# EAGLE board PCB_KioskMB_r3.3-02 (EAGLE 8.2.1), part 1 of 3
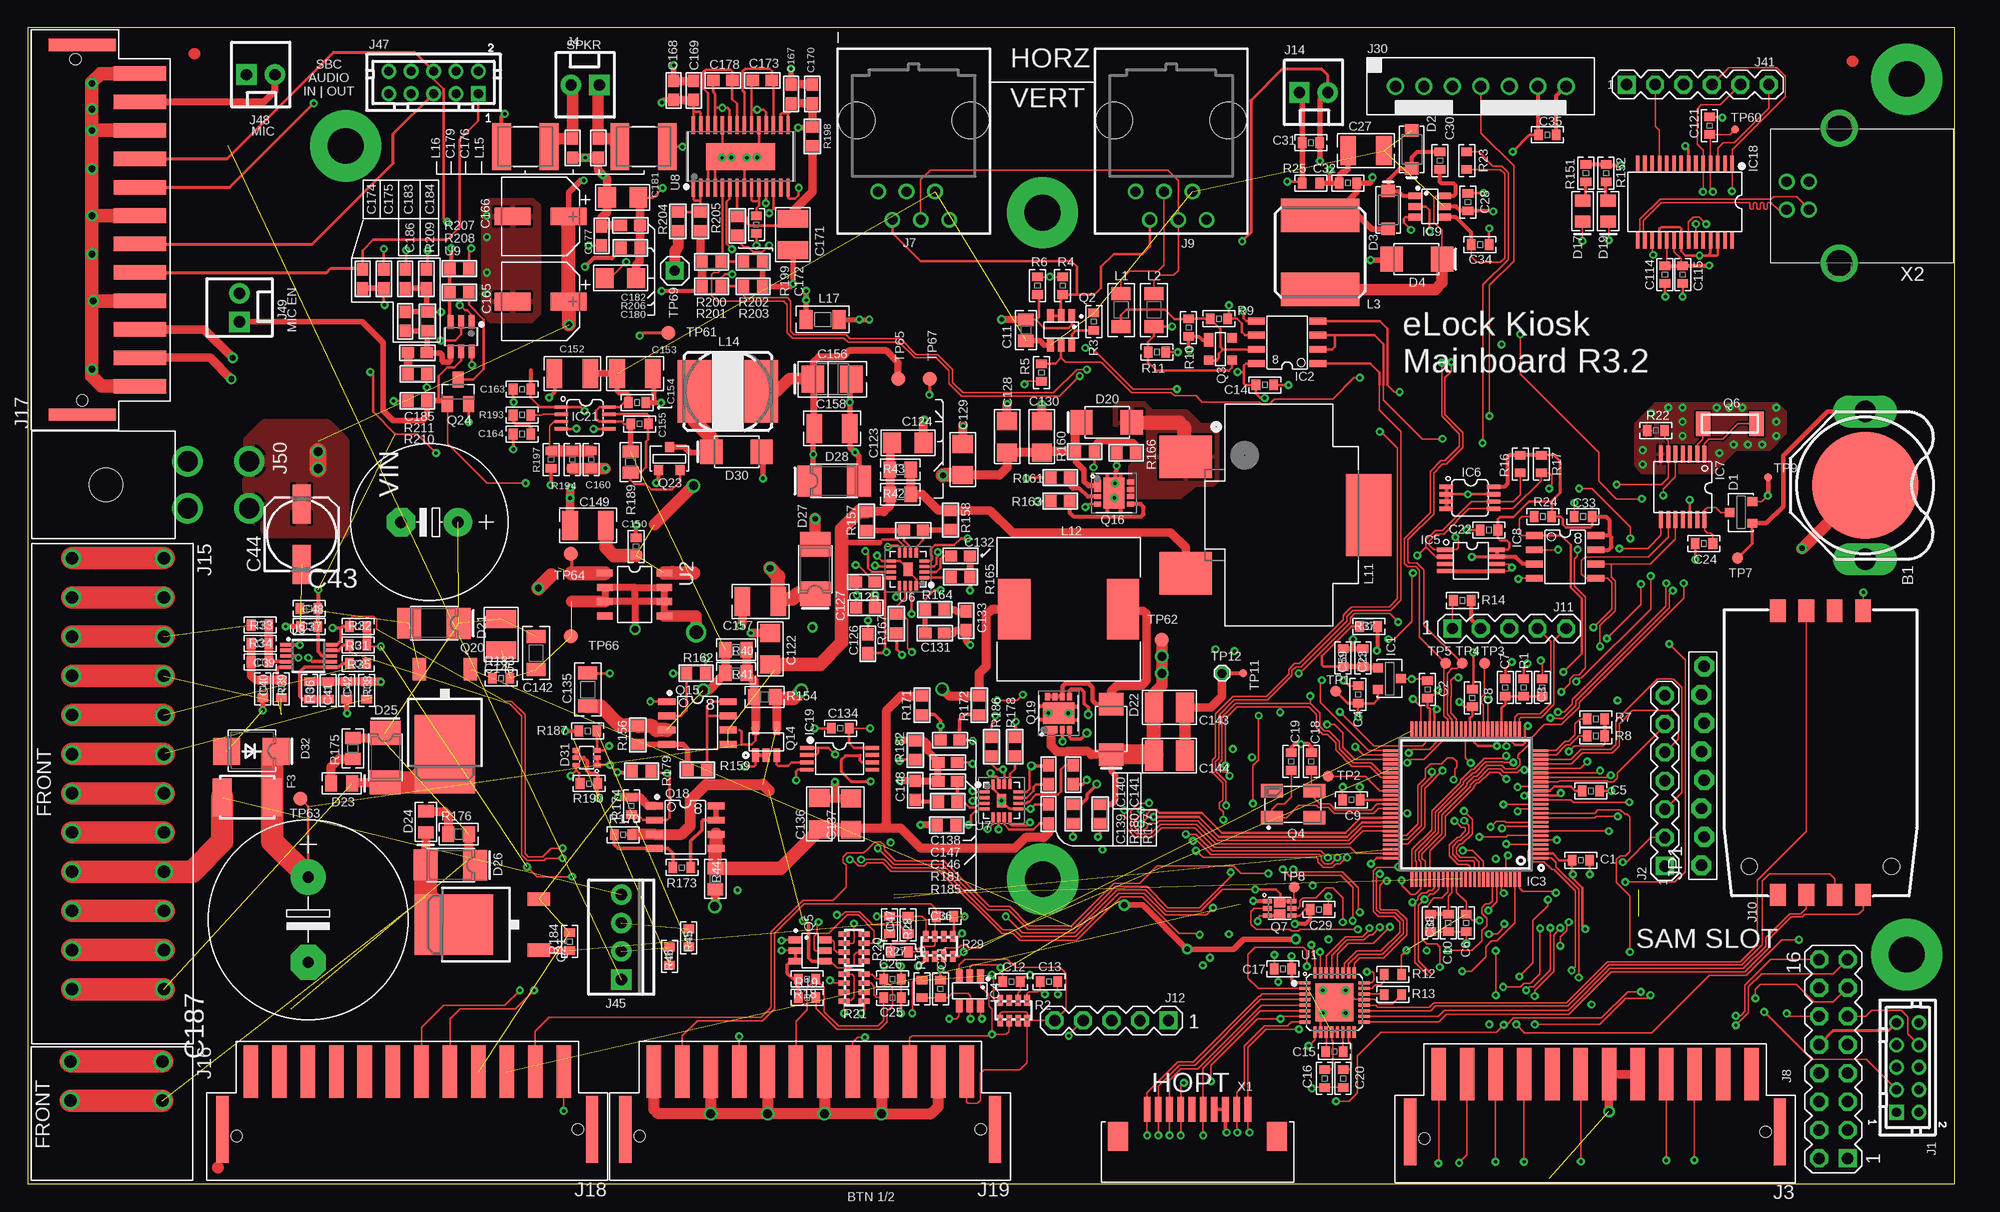
[diagram p0: board, top side]
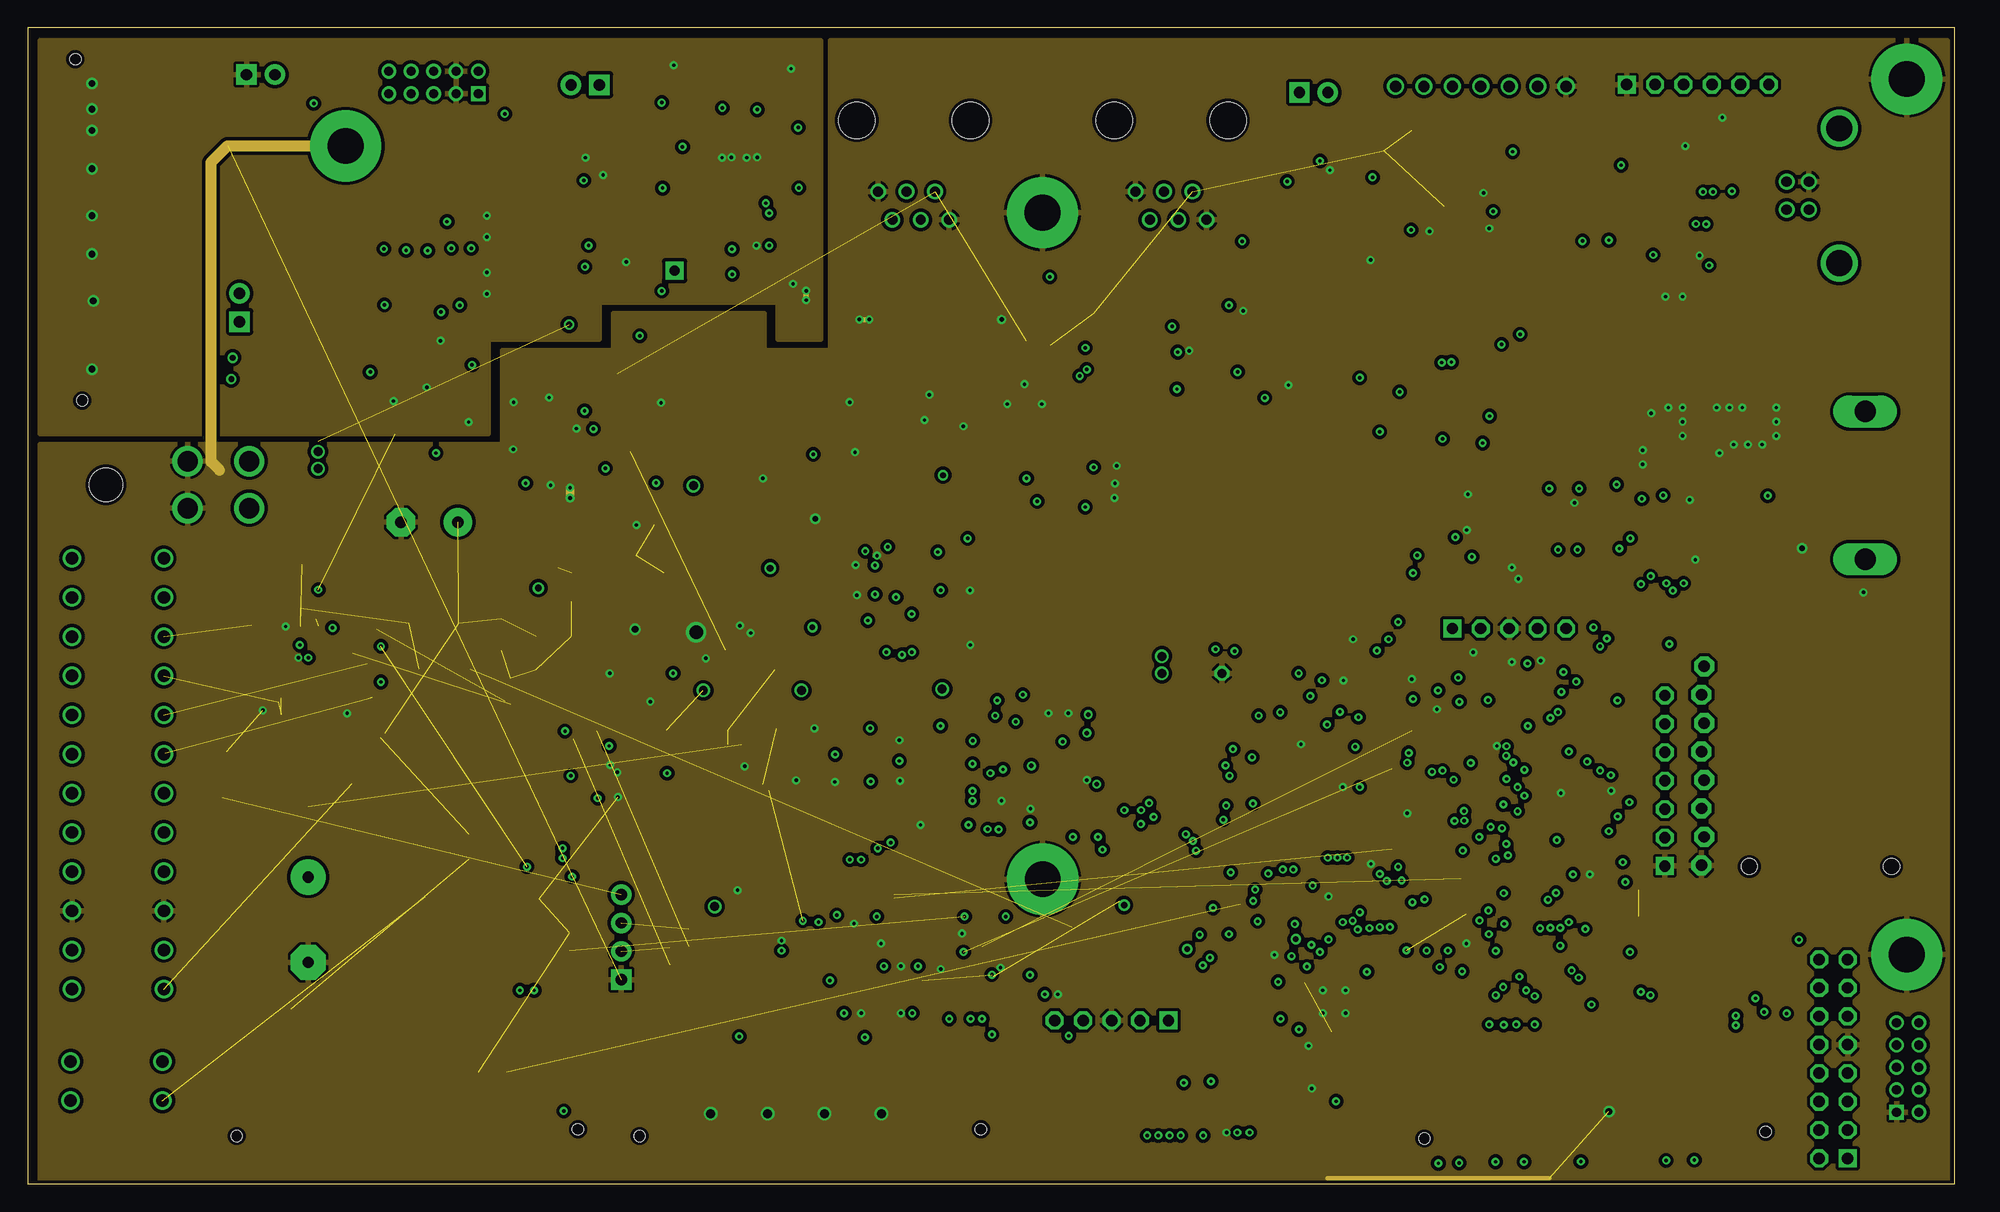
[diagram p1: board, inner layer DGND]
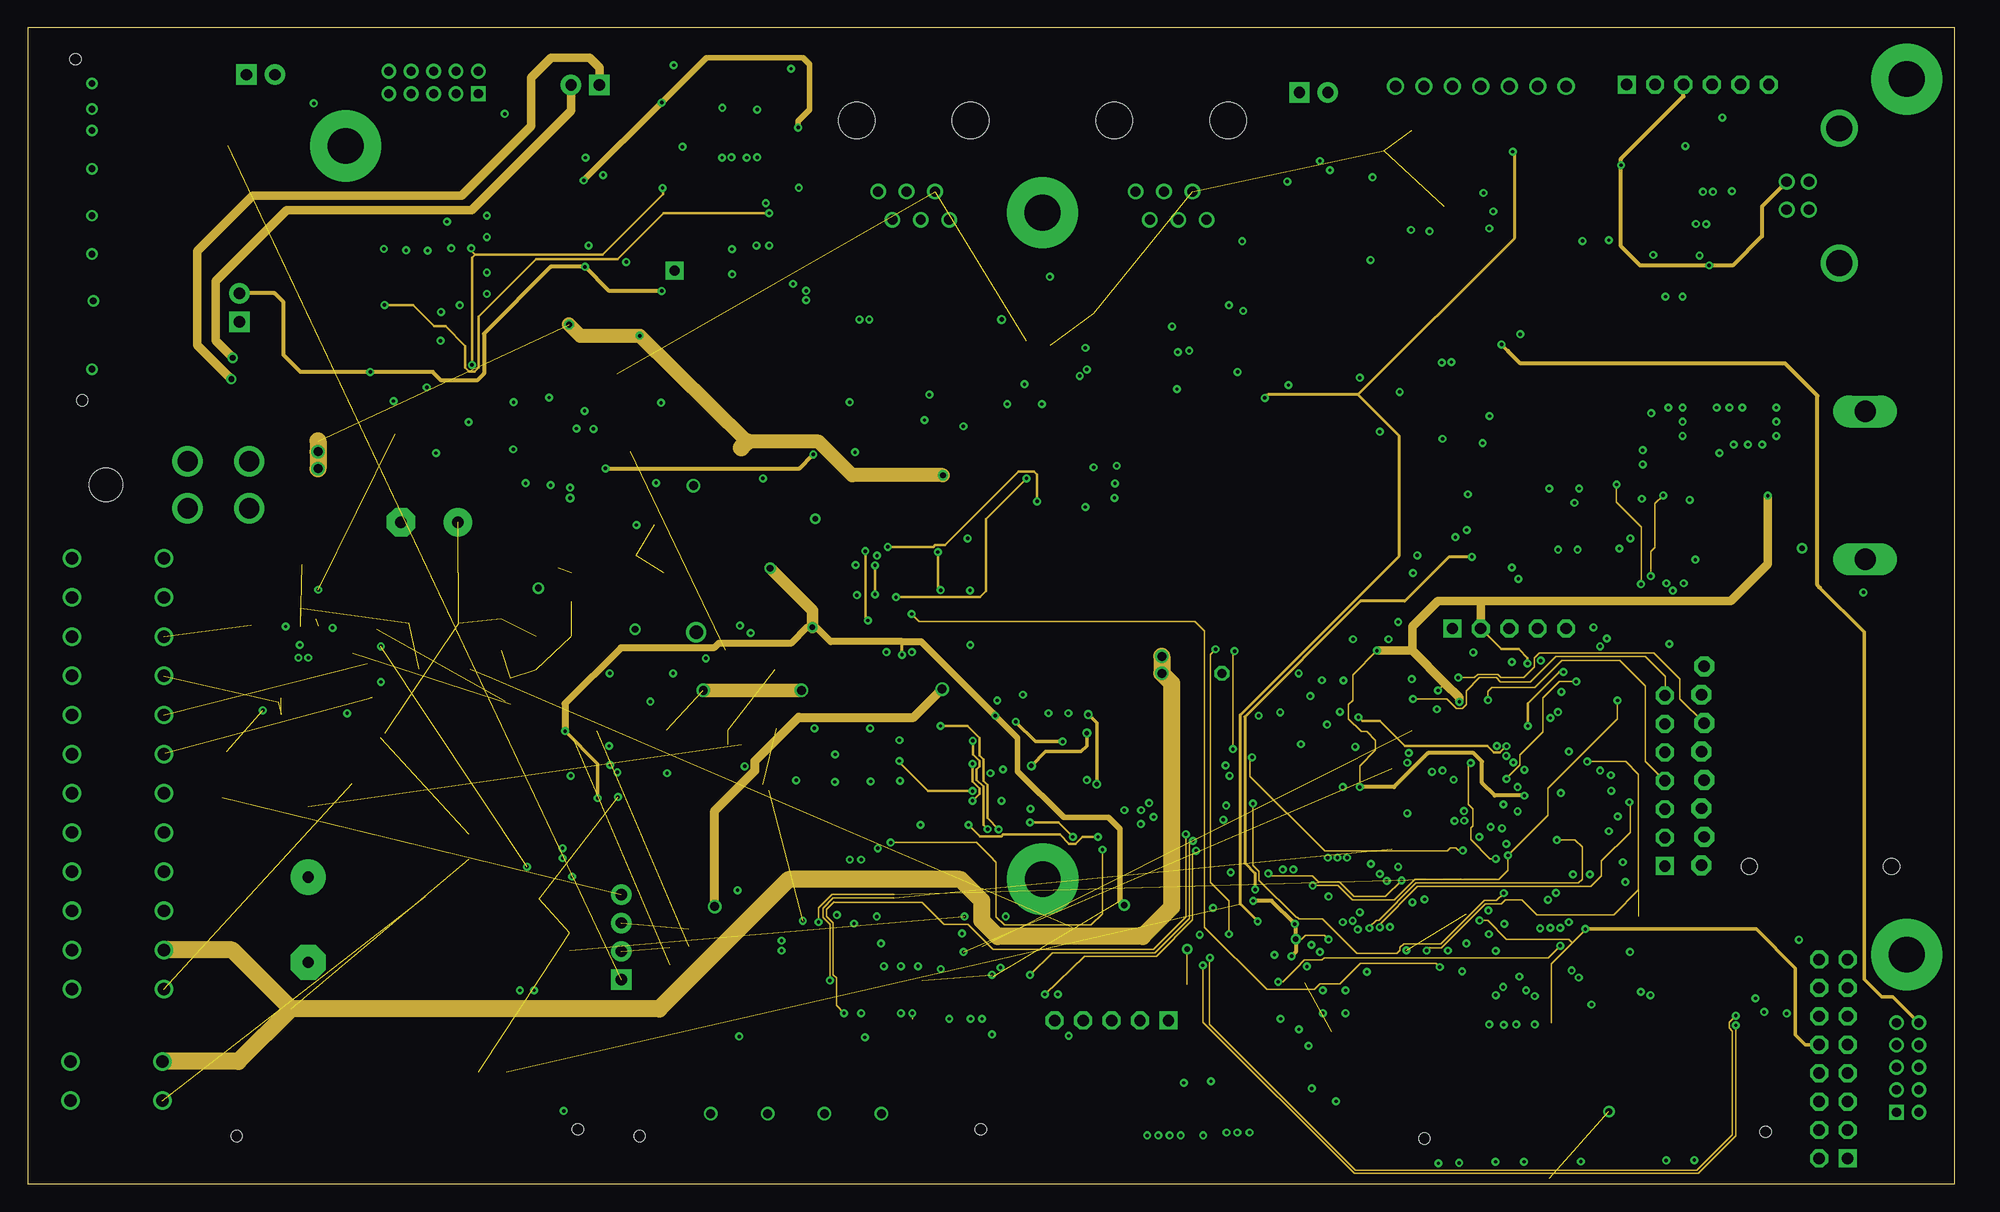
[diagram p2: board, inner layer SUPPLY]
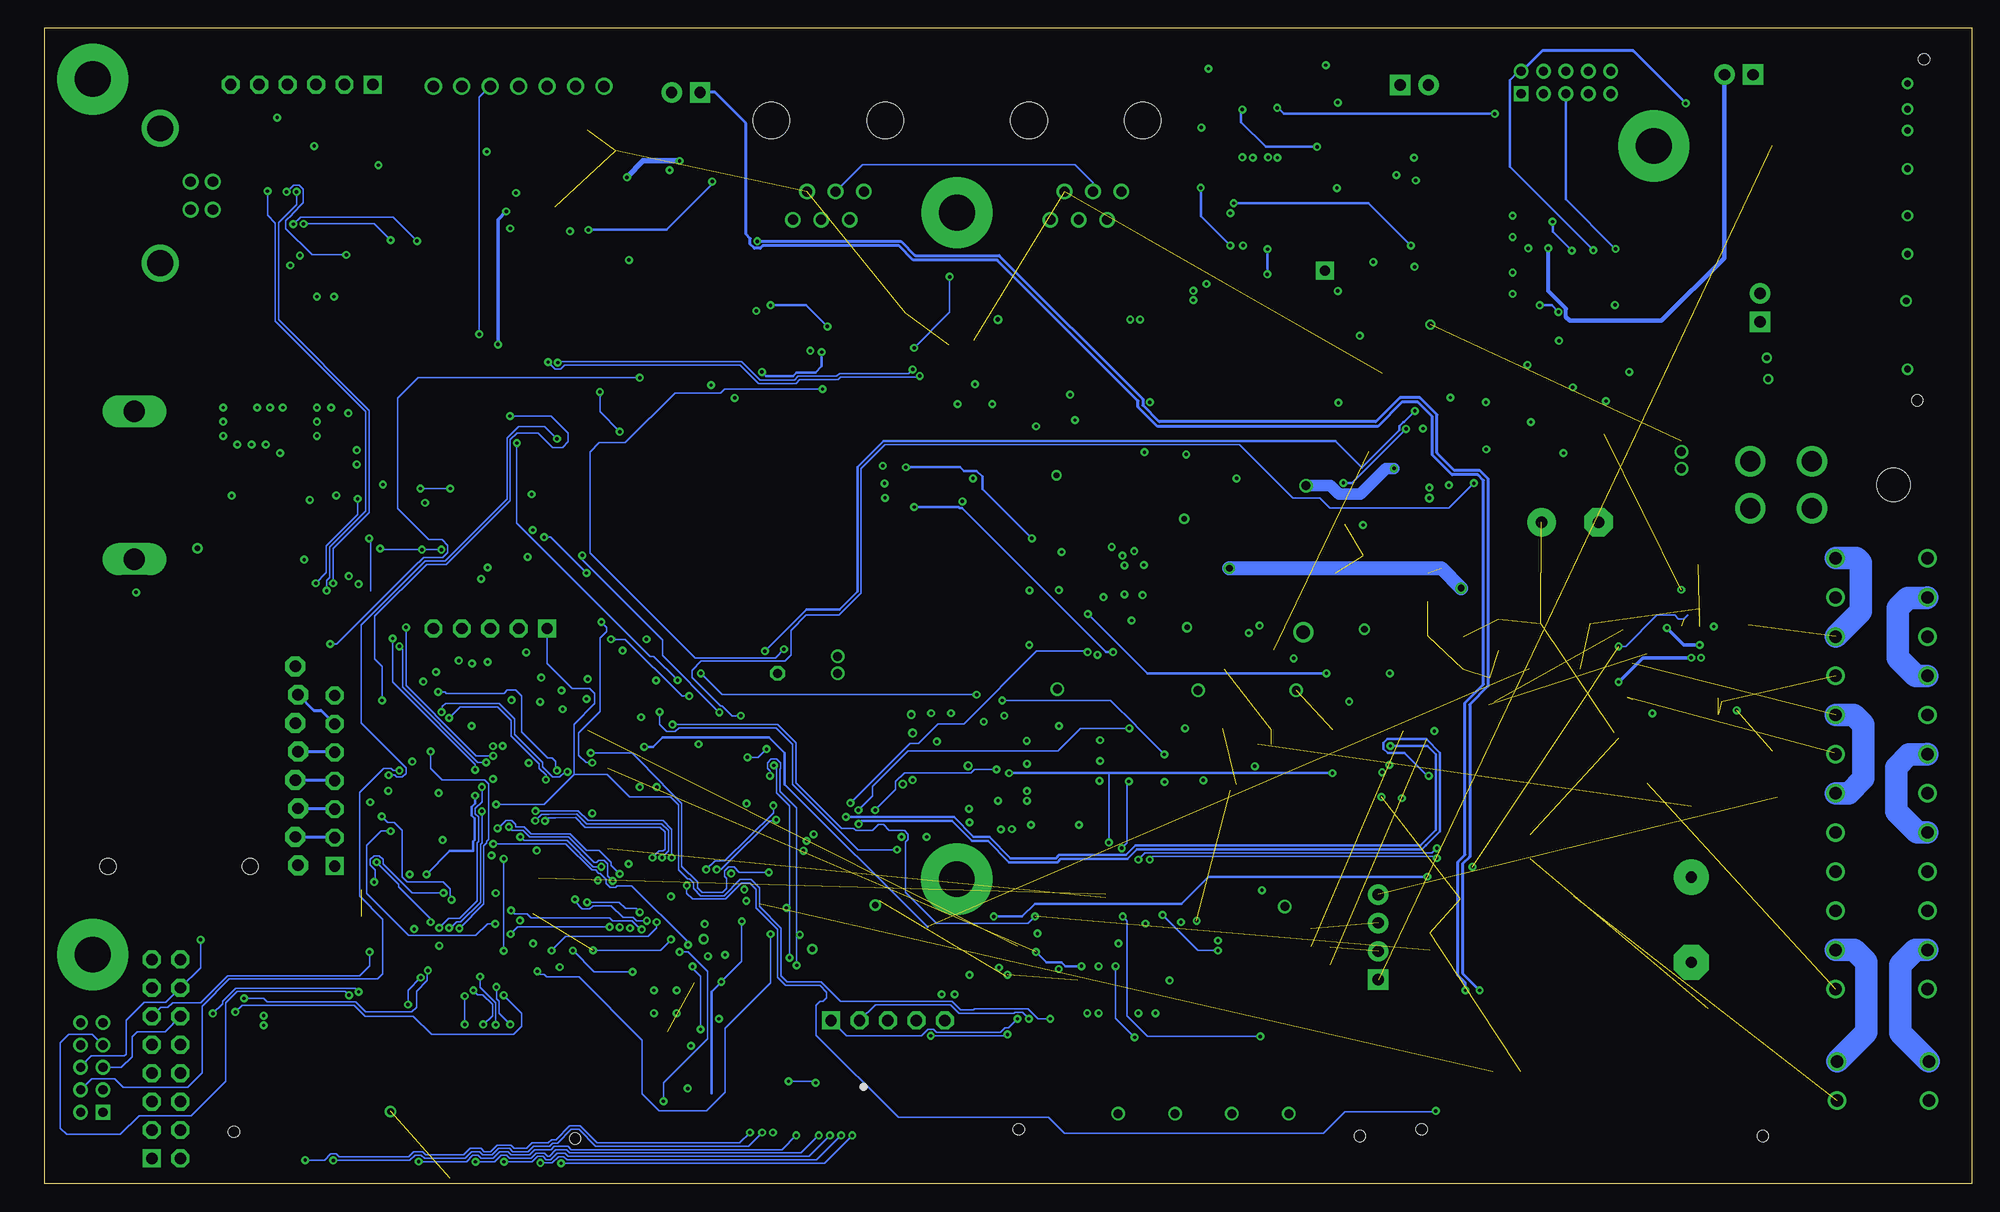
[diagram p3: board, bottom side, seen from below]

Size 172.11 x 103.25 mm. Coordinates in mm from the lower left corner, seen from the top.
Outline: 172.11,103.25 0,103.25 0,0 172.11,0 172.11,103.25
Copper layers (1*2*15*16): Top 0.035mm / dielectric 0.33mm / DGND 0.035mm / dielectric 0.8mm / SUPPLY 0.035mm / dielectric 0.33mm / Bottom 0.035mm
Design rules "alleybeachdrc4layer *": minimum track width 6mil, minimum drill 0.3mm, track to track 6mil, track to pad 6mil, pad to pad 6mil, via to via 6mil, smd to smd 6mil, copper to edge 10mil, drill to drill 10mil, minimum pad ring 10mil, minimum via ring 8mil, stop-mask expansion 5mil, vias tented up to drill 0.3mm, thermal gap 10mil

## Footprints (pad centres in the part's own frame; a part is rotated, then mirrored left to right if it is on the bottom)
3001 = drill 1.905 pad 2.413 long: + -6.6,0; +2 6.6,0 | smd 9.5 x 9.5: - 0,0
0603 = smd 0.762 x 0.965: 1 -0.787,0; 2 0.787,0
0805 = smd 1.092 x 1.397: 1 -0.94,0; 2 0.94,0
1210 = smd 1.397 x 2.591: 1 -1.6,0; 2 1.6,0
E5-13 = drill 1.016 pad 2.54: + -2.54,0 | drill 1.016 pad 2.54 octagon: - 2.54,0
153CLV-0605 = smd 3.5 x 1.6: + 2.7,0; - -2.7,0
C1206 = smd 1.6 x 1.8: 1 -1.4,0; 2 1.4,0
C0603 = smd 1.1 x 1: 1 -0.85,0; 2 0.85,0
1206 = smd 1.143 x 1.702: 1 -1.473,0; 2 1.473,0
C1210 = smd 1.6 x 2.7: 1 -1.4,0; 2 1.4,0
3528-POL = smd 2.007 x 2.388: 1 -1.702,0; 2 1.702,0
CAP_6.3MM_DIA_SMT = smd 1.6 x 3.2: 1 0,2.5; 2 0,-2.5
E7,5-18 = drill 1.016 pad 3.15: + -3.81,0 | drill 1.016 pad 3.15 octagon: - 3.81,0
SOT-23 = smd 0.787 x 0.889: 1 0.991,1.016; 2 -0.94,1.016; 3 0.025,-1.016
SOD-123 = smd 1.1 x 1.2: A 1.7,0; C -1.7,0
SOD-128 = smd 2 x 2.2: A 2.2,0; K -2.3,0
0805-POL = smd 1.092 x 1.397: 1+ -0.94,0; 2 0.94,0
SMA = smd 2.159 x 2.743: + -2.311,0.003; - 2.108,-0.002
SMA' = smd 2.159 x 2.743: A 2.108,-0.002; C -2.311,0.003
SOT-363 = smd 0.42 x 0.6: 1 -0.65,-0.95; 2 0,-0.95; 3 0.65,-0.95; 4 0.65,0.95; 5 0,0.95; 6 -0.65,0.95
SMB = smd 2.4 x 2.4: A 2.2,0; C -2.2,0
1812 = smd 1.702 x 3.4: 1 -2.235,0; 2 2.235,0
STANDOFF-ELECTRICAL = drill 3.2 pad 6.35: P1 0,0
SO08 = smd 0.61 x 1.524: 1 -1.905,-2.743; 2 -0.635,-2.743; 3 0.635,-2.743; 4 1.905,-2.743; 5 1.905,2.743; 6 0.635,2.743; 7 -0.635,2.743; 8 -1.905,2.743
SQFP-S-12X12-100 = smd 0.24 x 1.6: 1 -4.8,-6.6; 2 -4.4,-6.6; 3 -4,-6.6; 4 -3.6,-6.6; 5 -3.2,-6.6; 6 -2.8,-6.6; 7 -2.4,-6.6; 8 -2,-6.6; 9 -1.6,-6.6; 10 -1.2,-6.6; 11 -0.8,-6.6; 12 -0.4,-6.6; 13 0,-6.6; 14 0.4,-6.6; 15 0.8,-6.6; 16 1.2,-6.6; 17 1.6,-6.6; 18 2,-6.6; 19 2.4,-6.6; 20 2.8,-6.6; 21 3.2,-6.6; 22 3.6,-6.6; 23 4,-6.6; 24 4.4,-6.6; 25 4.8,-6.6; 51 4.8,6.6; 52 4.4,6.6; 53 4,6.6; 54 3.6,6.6; 55 3.2,6.6; 56 2.8,6.6; 57 2.4,6.6; 58 2,6.6; 59 1.6,6.6; 60 1.2,6.6; 61 0.8,6.6; 62 0.4,6.6; 63 0,6.6; 64 -0.4,6.6; 65 -0.8,6.6; 66 -1.2,6.6; 67 -1.6,6.6; 68 -2,6.6; 69 -2.4,6.6; 70 -2.8,6.6; 71 -3.2,6.6; 72 -3.6,6.6; 73 -4,6.6; 74 -4.4,6.6; 75 -4.8,6.6 | smd 1.6 x 0.24: 26 6.6,-4.8; 27 6.6,-4.4; 28 6.6,-4; 29 6.6,-3.6; 30 6.6,-3.2; 31 6.6,-2.8; 32 6.6,-2.4; 33 6.6,-2; 34 6.6,-1.6; 35 6.6,-1.2; 36 6.6,-0.8; 37 6.6,-0.4; 38 6.6,0; 39 6.6,0.4; 40 6.6,0.8; 41 6.6,1.2; 42 6.6,1.6; 43 6.6,2; 44 6.6,2.4; 45 6.6,2.8; 46 6.6,3.2; 47 6.6,3.6; 48 6.6,4; 49 6.6,4.4; 50 6.6,4.8; 76 -6.6,4.8; 77 -6.6,4.4; 78 -6.6,4; 79 -6.6,3.6; 80 -6.6,3.2; 81 -6.6,2.8; 82 -6.6,2.4; 83 -6.6,2; 84 -6.6,1.6; 85 -6.6,1.2; 86 -6.6,0.8; 87 -6.6,0.4; 88 -6.6,0; 89 -6.6,-0.4; 90 -6.6,-0.8; 91 -6.6,-1.2; 92 -6.6,-1.6; 93 -6.6,-2; 94 -6.6,-2.4; 95 -6.6,-2.8; 96 -6.6,-3.2; 97 -6.6,-3.6; 98 -6.6,-4; 99 -6.6,-4.4; 100 -6.6,-4.8
SOT23-6 = smd 0.6 x 1.2: 1 -0.95,-1.306; 2 0,-1.306; 3 0.95,-1.306; 4 0.95,1.306; 5 0.003,1.306; 6 -0.95,1.306
TSSOP08-3 = smd 0.38 x 1.4: 1 -0.94,-2.343; 2 -0.305,-2.343; 3 0.33,-2.343; 4 0.965,-2.343; 5 0.965,2.292; 6 0.33,2.292; 7 -0.305,2.292; 8 -0.94,2.292
MSOP-08 = smd 0.38 x 1.2: 1 -1.008,-2.18; 2 -0.358,-2.18; 3 0.292,-2.18; 4 0.942,-2.18; 5 0.942,2.045; 6 0.292,2.045; 7 -0.358,2.045; 8 -1.008,2.045
TSSOP014 = smd 0.356 x 1.524: 1 -1.95,-2.873; 2 -1.305,-2.873; 3 -0.65,-2.873; 4 -0.005,-2.873; 5 0.65,-2.873; 6 1.295,-2.873; 7 1.95,-2.873; 8 1.95,2.962; 9 1.295,2.962; 10 0.65,2.962; 11 -0.005,2.962; 12 -0.65,2.962; 13 -1.305,2.962; 14 -1.95,2.962
SO-08 = smd 0.61 x 1.524: 1 -1.905,-2.743; 2 -0.635,-2.743; 3 0.635,-2.743; 4 1.905,-2.743; 5 1.905,2.743; 6 0.635,2.743; 7 -0.635,2.743; 8 -1.905,2.743
SSOP28DB = smd 0.32 x 1.4: 1 -4.225,-3.45; 2 -3.575,-3.45; 3 -2.925,-3.45; 4 -2.275,-3.45; 5 -1.625,-3.45; 6 -0.975,-3.45; 7 -0.325,-3.45; 8 0.325,-3.45; 9 0.975,-3.45; 10 1.625,-3.45; 11 2.275,-3.45; 12 2.925,-3.45; 13 3.575,-3.45; 14 4.225,-3.45; 15 4.225,3.45; 16 3.575,3.45; 17 2.925,3.45; 18 2.275,3.45; 19 1.625,3.45; 20 0.975,3.45; 21 0.325,3.45; 22 -0.325,3.45; 23 -0.975,3.45; 24 -1.625,3.45; 25 -2.275,3.45; 26 -2.925,3.45; 27 -3.575,3.45; 28 -4.225,3.45
TSSOP8 = smd 0.35 x 1.2: 1 -0.975,-2.925; 2 -0.325,-2.925; 3 0.325,-2.925; 4 0.975,-2.925; 5 0.975,2.925; 6 0.325,2.925; 7 -0.325,2.925; 8 -0.975,2.925
MSOP-08' = smd 0.3 x 1.2: 1 -1.008,-2.18; 2 -0.358,-2.18; 3 0.292,-2.18; 4 0.942,-2.18; 5 0.942,2.045; 6 0.292,2.045; 7 -0.358,2.045; 8 -1.008,2.045
DF11-10DP-2DSA = drill 0.813 pad 1.321 square: 1 4,-1 | drill 0.813 pad 1.321: 2 4,1; 3 2,-1; 4 2,1; 5 0,-1; 6 0,1; 7 -2,-1; 8 -2,1; 9 -4,-1; 10 -4,1
MA07-1 = drill 1.016 pad 1.6 square: 1 -7.62,0 | drill 1.016 pad 1.6 octagon: 2 -5.08,0; 3 -2.54,0; 4 0,0; 5 2.54,0; 6 5.08,0; 7 7.62,0
14011213102000 = smd 1.3 x 4.7: 1 13.97,-4.4; 2 11.43,-4.4; 3 8.89,-4.4; 4 6.35,-4.4; 5 3.81,-4.4; 6 1.27,-4.4; 7 -1.27,-4.4; 8 -3.81,-4.4; 9 -6.35,-4.4; 10 -8.89,-4.4; 11 -11.43,-4.4; 12 -13.97,-4.4 | smd 1.1 x 6: P$1 16.51,0.75; P$2 -16.51,0.75 | hole 1: -15.24,0.75; 15.24,1.35
3-641215-2 = drill 1.016 pad 1.829 square: 1 2.54,0 | drill 1.016 pad 1.829: 2 0,0
SS-6566-NF = drill 0.889: 1 -3.175,8.89; 2 -1.905,6.35; 3 -0.635,8.89; 4 0.635,6.35; 5 1.905,8.89; 6 3.175,6.35 | hole 3.251: 5.08,0; -5.08,0
MA08-2 = drill 1.016 pad 1.6 square: 1 -8.89,-1.27 | drill 1.016 pad 1.6 octagon: 2 -8.89,1.27; 3 -6.35,-1.27; 4 -6.35,1.27; 5 -3.81,-1.27; 6 -3.81,1.27; 7 -1.27,-1.27; 8 -1.27,1.27; 9 1.27,-1.27; 10 1.27,1.27; 11 3.81,-1.27; 12 3.81,1.27; 13 6.35,-1.27; 14 6.35,1.27; 15 8.89,-1.27; 16 8.89,1.27
CCM03-3504LFT-NR = smd 2 x 1.4: C1 12.7,3.81; C2 12.7,1.27; C3 12.7,-1.27; C4 12.7,-3.81; C5 -12.7,3.81; C6 -12.7,1.27; C7 -12.7,-1.27; C8 -12.7,-3.81 | hole 1.422: 10.16,6.35; 10.16,-6.35
MA05-1 = drill 1.016 pad 1.6 square: 1 -5.08,0 | drill 1.016 pad 1.6 octagon: 2 -2.54,0; 3 0,0; 4 2.54,0; 5 5.08,0
1990834 = drill 1.1: 1 0,0; 1A 0,8.2; 2 3.5,0; 2A 3.5,8.2; 3 7,0; 3A 7,8.2; 4 10.5,0; 4A 10.5,8.2; 5 14,0; 5A 14,8.2; 6 17.5,0; 6A 17.5,8.2; 7 21,0; 7A 21,8.2; 8 24.5,0; 8A 24.5,8.2; 9 28,0; 9A 28,8.2; 10 31.5,0; 10A 31.5,8.2; 11 35,0; 11A 35,8.2; 12 38.5,0; 12A 38.5,8.2
1990737 = drill 1.1: 1 0,0; 1A 0,8.2; 2 3.5,0; 2A 3.5,8.2
HRXL-MAXSONAR-WRC-MB7387 = drill 1.016: 1 2.54,2.54; 2 5.08,2.54; 3 7.62,2.54; 4 10.16,2.54; 5 12.7,2.54; 6 15.24,2.54; 7 17.78,2.54
MA06-1 = drill 1.016 pad 1.6 square: 1 -6.35,0 | drill 1.016 pad 1.6 octagon: 2 -3.81,0; 3 -1.27,0; 4 1.27,0; 5 3.81,0; 6 6.35,0
3-641215-4 = drill 1.016 pad 1.829 square: 1 3.81,0 | drill 1.016 pad 1.829: 2 1.27,0; 3 -1.27,0; 4 -3.81,0
0039301040 = drill 1.8: 1 -2.1,0; 2 2.1,0; 3 -2.1,5.5; 4 2.1,5.5 | hole 3: 0,-7.3
1X08-LOCK = drill 1.016 pad 1.778 octagon: 1 -8.89,0.127; 2 -6.35,-0.127; 3 -3.81,0.127; 4 -1.27,-0.127; 5 1.27,0.127; 6 3.81,-0.127; 7 6.35,0.127; 8 8.89,-0.127
NRS8030 = smd 7 x 3: 1 0,-3.3; 2 0,3.3
L_SER20XX = smd 3.81 x 4.699: 1 -5.207,-8.319; 2 5.207,-8.319 | smd 7.366 x 4.064: 3 0,8.001
L_SRR1280 = smd 5.4 x 2.9: 1 0,4.85; 2 0,-4.85
CR75 = smd 5.6 x 3: 1 0,-3; 2 0,3
L1812 = smd 1.66 x 4.22: 1 -2.12,0; 2 2.12,0
SSOT-6 = smd 0.6 x 1.2: 1 -0.95,-1.306; 2 0,-1.306; 3 0.95,-1.306; 4 0.95,1.306; 5 0.003,1.306; 6 -0.95,1.306
SOT-143 = smd 1.194 x 0.838: 1 -0.813,-1.041 | smd 0.838 x 0.838: 2 0.991,-1.041; 3 0.991,1.041; 4 -1.016,1.041
7B = smd 2 x 1.2: 1 -1.9,-1.2; 2 1.9,-1.2; 3 1.9,1.2; 4 -1.9,1.2
CM519 = smd 1.3 x 2.2: 1 -2.4,0; 2 2.4,0
MICRO_FET = smd 0.42 x 0.8: 1 -0.65,-1.1; 2 0,-1.1; 3 0.65,-1.1; 4 0.65,1.1; 5 0,1.1; 6 -0.65,1.1 | smd 0.8 x 1: P1 -0.5,0; P2 0.5,0
SOT23-5 = smd 0.6 x 1.2: 1 -0.95,-1.206; 2 0,-1.206; 3 0.95,-1.206; 4 0.95,1.206; 5 -0.95,1.206
SON8_3.3X3.3_TI = smd 1.09 x 0.65: 1_2 -0.65,-1.475 | smd 0.44 x 0.65: 3 0.325,-1.475; 4 0.975,-1.475; 5 0.975,1.475; 6 0.325,1.475; 7 -0.325,1.475; 8 -0.975,1.475 | smd 2.8 x 1.9: EP 0,0
TO252 = smd 1.2 x 2: 1 -2.28,-4.8; 2 2.28,-4.8 | smd 5.4 x 7: 3 0,2.8
SOT23 = smd 1 x 1.4: 1 -0.95,-1.1; 2 0.95,-1.1; 3 0,1.1
0603-ARRAY = smd 0.5 x 1: 1 -1.2,-0.9; 2 -0.4,-0.9; 3 0.4,-0.9; 4 1.2,-0.9; 5 1.2,0.9; 6 0.4,0.9; 7 -0.4,0.9; 8 -1.2,0.9
0603-0RTOP = smd 0.762 x 0.965: 1 -0.787,0; 2 0.787,0
R0603 = smd 1 x 1.1: 1 -0.85,0; 2 0.85,0
SMD_ROUND_1MM = smd 1 x 1: P$1 0,0
SMD_ROUND_07MM = smd 0.7 x 0.7: P$1 0,0
TP_0.8_1.2 = drill 0.813 pad 1.219 octagon: 1 0,0
B1,27 = smd 1.27 x 1.27: TP 0,0
P1-13@1 = drill 0.914 pad 1.626 square: 1 0,0
LFCSP_5X5_032 = smd 1 x 0.3: 1 -2.65,1.75; 2 -2.65,1.25; 3 -2.65,0.75; 4 -2.65,0.25; 5 -2.65,-0.25; 6 -2.65,-0.75; 7 -2.65,-1.25; 8 -2.65,-1.75; 17 2.65,-1.75; 18 2.65,-1.25; 19 2.65,-0.75; 20 2.65,-0.25; 21 2.65,0.25; 22 2.65,0.75; 23 2.65,1.25; 24 2.65,1.75 | smd 0.3 x 1: 9 -1.75,-2.65; 10 -1.25,-2.65; 11 -0.75,-2.65; 12 -0.25,-2.65; 13 0.25,-2.65; 14 0.75,-2.65; 15 1.25,-2.65; 16 1.75,-2.65; 25 1.75,2.65; 26 1.25,2.65; 27 0.75,2.65; 28 0.25,2.65; 29 -0.25,2.65; 30 -0.75,2.65; 31 -1.25,2.65; 32 -1.75,2.65 | smd 3.4 x 3.4: PAD 0,0
LE33 = smd 0.635 x 1.4: 1 -1.905,-2.65; 2 -0.635,-2.65; 3 0.635,-2.65; 4 1.905,-2.65; 5 1.905,2.65; 6 0.635,2.65; 7 -0.635,2.65; 8 -1.905,2.65
MSOP10 = smd 0.3 x 1: 1 -1,-2.05; 2 -0.5,-2.05; 3 0,-2.05; 4 0.5,-2.05; 5 1,-2.05; 6 1,2.05; 7 0.5,2.05; 8 0,2.05; 9 -0.5,2.05; 10 -1,2.05
QFN16_3X3_EP = smd 0.85 x 0.28: 1 -1.475,0.75; 2 -1.475,0.25; 3 -1.475,-0.25; 4 -1.475,-0.75; 9 1.475,-0.75; 10 1.475,-0.25; 11 1.475,0.25; 12 1.475,0.75 | smd 0.28 x 0.85: 5 -0.75,-1.475; 6 -0.25,-1.475; 7 0.25,-1.475; 8 0.75,-1.475; 13 0.75,1.475; 14 0.25,1.475; 15 -0.25,1.475; 16 -0.75,1.475 | smd 0.8 x 1.2: EP 0,0
TSSOP28_EP = smd 1.6 x 0.3: 1 -2.8,4.225; 2 -2.8,3.575; 3 -2.8,2.925; 4 -2.8,2.275; 5 -2.8,1.625; 6 -2.8,0.975; 7 -2.8,0.325; 8 -2.8,-0.325; 9 -2.8,-0.975; 10 -2.8,-1.625; 11 -2.8,-2.275; 12 -2.8,-2.925; 13 -2.8,-3.575; 14 -2.8,-4.225; 15 2.8,-4.225; 16 2.8,-3.575; 17 2.8,-2.925; 18 2.8,-2.275; 19 2.8,-1.625; 20 2.8,-0.975; 21 2.8,-0.325; 22 2.8,0.325; 23 2.8,0.975; 24 2.8,1.625; 25 2.8,2.275; 26 2.8,2.925; 27 2.8,3.575; 28 2.8,4.225 | smd 2.4 x 6.17: EP 0,0
SOT23-6' = smd 0.55 x 1.2: 1 -0.95,-1.3; 2 0,-1.3; 3 0.95,-1.3; 4 0.95,1.3; 5 0,1.3; 6 -0.95,1.3
CON-FPC-1.0MM-10POS = smd 0.6 x 2.2: 1 -4.5,0; 2 -3.5,0; 3 -2.5,0; 4 -1.5,0; 5 -0.5,0; 6 0.5,0; 7 1.5,0; 8 2.5,0; 9 3.5,0; 10 4.5,0 | smd 1.8 x 2.6: P$1 -7.1,-2.4; P$2 7.1,-2.4
85-32004-10X = drill 0.92 pad 1.27: 1 4.71,-1.25; 2 4.71,1.25; 3 2.71,1.25; 4 2.71,-1.25 | drill 2.3 pad 3: M1 0,6.02; M2 0,-6.02

## Placement (x,y rotation side)
B1  3001/3.3V  [3001]  164.11,62.4 270 top
C1  1u/10V  [0603]  138.71,28.9 0 top
C2  0.1uF  [0603]  125.01,44.15 90 top
C3  10uF/4V  [0603]  135.25,44.32 90 top
C4  0.1uF  [0603]  118.81,43.7 90 top
C5  0.1uF  [0603]  139.61,35.1 0 top
C6  0.1uF  [0603]  128.47,23.3 270 top
C7  10uF/4V  [0603]  131.95,44.32 90 top
C8  1u/10V  [0603]  129.01,43.4 90 top
C9  10uF/4V  [0603]  118.21,34.3 180 top
C10  10uF/4V  [0603]  126.87,23.3 90 top
C11  4.7uF/16V  [0805]  89.14,76.25 90 top
C12  10nF  [0603]  87.85,18.05 180 top
C13  10nF  [0603]  91.19,18.05 0 top
C14  1u/6.3V  [0603]  110.48,71.37 0 top
C15  1u/10V  [0603]  116.71,11.81 0 top
C16  4.7uF/6.3V  [0603]  115.82,9.4 90 top
C17  0.1uF  [0603]  112.11,19.2 180 top
C18  18pF  [0603]  114.63,37.71 270 top
C19  18pF  [0603]  112.83,37.71 270 top
C20  4.7uF/6.3V  [0603]  117.47,9.4 90 top
C21  0.1uF  [0603]  81.5,17.4 90 top
C22  0.1uF  [0603]  130.51,58.4 180 top
C23  10uF/4V  [0603]  119.25,46.99 90 top
C24  1u/10V  [0603]  149.71,57.2 180 top
C25  10nF  [0603]  77.22,16.64 0 top
C26  10nF  [0603]  77.22,18.29 0 top
C27  22u/16V  [1210]  119.51,92.3 180 top
C28  1uF/16V  [0603]  128.61,87.7 90 top
C29  10uF/4V  [0603]  115.31,24.5 180 top
C30  0.1uF  [0603]  126.11,91.4 270 top
C31  1uF/16V  [0603]  114.61,93 180 top
C32  1uF/16V  [0603]  117.91,89.4 180 top
C33  0.1uF  [0603]  138.91,59.6 180 top
C34  dnp  [0603]  129.71,83.9 0 top
C35  0.1uF  [0603]  135.71,93.7 180 top
C36  10nF  [0603]  81.92,23.88 0 top
C37  0.1uF  [0603]  25.11,49.8 180 top
C38  10uF/4V  [0603]  125.27,23.3 90 top
C39  10uF/4V  [0603]  20.73,46.61 180 top
C40  0.1uF  [0603]  20.98,44.2 270 top
C41  10uF/4V  [0603]  26.82,44.07 90 top
C42  0.1uF  [0603]  28.47,44.07 270 top
C43  470uF/35-50V  [E5-13]  35.86,59.1 180 top
C44  220uF, 16V, AL  [153CLV-0605]  24.44,58.02 90 top
C47  10nF  [0603]  76.96,23.11 270 top
C48  10uF  [0603]  25.1,51.38 180 top
C59  10uF/4V  [0603]  117.47,46.99 90 top
C114  0.1u  [0603]  146.21,81.21 90 top
C115  4.7uF/6.3V  [0603]  147.81,81.21 90 top
C121  0.1u  [0603]  150.21,94.51 270 top
C122  22uF,25V,1206  [C1206]  66.3,47.79 90 top
C123  22uF,25V,1206  [C1206]  78.6,66.19 0 top
C124  100pF,C0G  [C0603]  79.1,58.39 0 top
C125  0.1uF  [C0603]  74.79,53.76 0 top
C126  0.1uF  [C0603]  75.02,48.25 270 top
C127  4.7uF/6.3V  [C0603]  74.81,51.45 180 top
C128  22uF,25V,1206  [C1206]  87.47,66.73 90 top
C129  22uF,25V,1206  [C1206]  83.5,64.7 90 top
C130  22uF,25V,1206  [C1206]  90.57,66.73 90 top
C131  130pF,C0G  [C0603]  81,49.19 0 top
C132  0.1uF  [C0603]  83.3,56.09 0 top
C133  15nF  [C0603]  83.8,50.29 270 top
C134  10nF  [0603]  72.56,40.69 180 top
C135  10uF/35V  [1206]  50.01,44.15 90 top
C136  22uF,25V,1206  [C1206]  70.69,33.06 90 top
C137  22uF,25V,1206  [C1206]  73.53,33.03 90 top
C138  100pF,C0G  [C0603]  82.36,39.64 0 top
C139  0.1uF  [C0603]  91.16,33.04 90 top
C140  0.1uF  [C0603]  91.16,36.54 90 top
C141  4.7uF/6.3V  [C0603]  93.36,36.54 270 top
C142  10uF/35V  [1206]  45.38,47.41 270 top
C143  10uF,50V,1210  [C1210]  101.96,42.54 0 top
C144  10uF,50V,1210  [C1210]  101.96,38.24 0 top
C145  10uF,50V,1210  [C1210]  42.27,49.06 270 top
C146  100pF  [C0603]  82.16,35.94 180 top
C147  0.1uF  [C0603]  82.16,37.64 180 top
C148  10nF  [C0603]  79.26,35.14 90 top
C149  22u/16V  [1210]  50.02,58.82 180 top
C150  0.1uF  [0603]  54.32,56.92 90 top
C152  22u/16V  [1210]  48.62,72.38 180 top
C153  22u/16V  [1210]  54.22,72.38 0 top
C154  0.1uF  [0603]  54.42,69.78 0 top
C155  1nF  [0603]  54.62,67.88 0 top
C156  TCJB157M006R0045  [3528-POL]  71.82,71.88 0 top
C157  47u/6.3V  [1210]  65.42,52.02 180 top
C158  47u/6.3V  [1210]  71.82,67.48 0 top
C160  15pF  [0603]  50.32,64.68 270 top
C163  0.1uF  [0603]  44.12,70.98 180 top
C164  330pF  [0603]  44.12,66.98 180 top
C165  220uF,16V,AL  [CAP_6.3MM_DIA_SMT]  45.79,78.82 270 top
C166  220uF,16V,AL  [CAP_6.3MM_DIA_SMT]  45.79,86.42 270 top
C167  0.1uF  [C0603]  68.16,97.37 90 top
C168  0.1uF  [C0603]  57.66,97.67 90 top
C169  1.0nF,50V  [C0603]  59.46,97.67 90 top
C170  1.0nF,50V  [C0603]  70.06,97.37 90 top
C171  10uF,50V,1210  [C1210]  68.32,84.8 270 top
C172  1uF,25V  [0603]  65.06,85.67 270 top
C173  0.47uF  [C0603]  65.6,98.57 180 top
C174  0.47uF  [C0603]  29.89,80.84 270 top
C175  0.47uF  [C0603]  31.79,80.84 270 top
C176  1.0nF,50V  [C0603]  50.94,92.52 270 top
C177  0.47uF  [C0603]  51.23,84.67 270 top
C178  0.47uF  [C0603]  62.06,98.57 180 top
C179  1.0nF,50V  [C0603]  48.64,92.52 270 top
C180  22uF,25V,1206  [C1206]  52.92,80.92 180 top
C181  22uF,25V,1206  [C1206]  53.12,88.12 180 top
C182  1uF,25V  [C0603]  53.82,85.62 180 top
C183  3.3uF,16V  [C0603]  33.69,80.84 90 top
C184  3.3uF,16V  [C0603]  35.59,80.84 90 top
C185  3.3uF,16V  [C0603]  34.79,74.24 180 top
C186  220pF  [C0603]  33.69,77.04 90 top
C187  2mF/16V  [E7,5-18]  25.03,23.58 270 top
D1  BAS70-05E6327  [SOT-23]  153.01,60 270 top
D2  DNP  [SOD-123]  123.61,92.4 90 top
D3  STPS0540Z  [SOD-123]  121.51,87 270 top
D4  PMEG3030BEP  [SOD-128]  124.01,82.6 180 top
D17  LED-GR  [0805-POL]  138.86,86.89 90 top
D19  LED-GR  [0805-POL]  141.16,86.89 90 top
D20  PMEG3030BEP  [SOD-128]  96.4,68.01 0 top
D21  SMAJ26A  [SMA]  36.17,50.06 180 top
D22  PMEG3030BEP  [SOD-128]  96.76,40.64 90 top
D23  LED-GR  [0805-POL]  28.02,35.76 180 top
D24  LED-GR  [0805-POL]  35.54,32.34 90 top
D25  SS14  [SMA']  31.91,37.95 270 top
D26  SS14  [SMA']  37.64,28.47 180 top
D27  SMLVT3V3  [SMA]  70.32,55.02 90 top
D28  SMAJ5.0A  [SMA]  72.12,62.78 0 top
D30  PMEG3030BEP  [SOD-128]  63.32,65.38 0 top
D31  BAT54BRW-7F  [SOT-363]  49.91,38.05 90 top
D32  P6SMB16A  [SMB]  19.97,38.62 180 top
DRILEGEND  [DRILEGEND]  -3.36,-15.09 0 top  (outside the outline)
F3  2920L250DR  [1812]  19.59,34.52 0 top
FID1  [REF]  16.97,1.45 0 top
FID2  [REF]  162.99,100.27 0 top
FID3  [REF]  14.88,100.96 0 top
H1  STANDOFF_ELECTRICAL  [STANDOFF-ELECTRICAL]  28.39,92.72 0 top
H2  STANDOFF_ELECTRICAL  [STANDOFF-ELECTRICAL]  90.64,27.21 0 top
H3  STANDOFF_ELECTRICAL  [STANDOFF-ELECTRICAL]  167.83,20.47 0 top
H4  STANDOFF_ELECTRICAL  [STANDOFF-ELECTRICAL]  167.84,98.69 0 top
H5  STANDOFF_ELECTRICAL  [STANDOFF-ELECTRICAL]  90.61,86.75 0 top
H6  STANDOFF_ELECTRICAL  [STANDOFF-ELECTRICAL]  -36.32,3.19 0 top  (outside the outline)
IC1  ISL60002DIH325Z-TK  [SOT-23]  121.61,45.1 90 top
IC2  SN65HVD12D  [SO08]  112.48,75.17 90 top
IC3  PIC24FJ256GA110-I/PT  [SQFP-S-12X12-100]  128.41,33.9 90 top
IC4  PIC10F200T-I/OT  [SOT23-6]  84.14,17.24 180 top
IC5  LM75ADP  [TSSOP08-3]  128.91,55.7 270 top
IC6  24LC32A-I/MS  [MSOP-08]  128.87,61.24 270 top
IC7  PCF2123TS/1-T  [TSSOP014]  147.81,62.3 180 top
IC8  M25P16-VMN6P  [SO-08]  137.31,56 270 top
IC9  LM3405AXMK/NOPB  [SOT23-6]  125.21,87.3 270 top
IC18  FT232RL  [SSOP28DB]  148.01,87.71 180 top
IC19  MCP6022-I/ST  [TSSOP8]  72.5,37.97 270 top
IC21  LTC1771EMS8  [MSOP-08']  49.82,68.38 270 top
J1  DF11-10DP-2DSA(01)  [DF11-10DP-2DSA]  167.91,10.39 270 top
J2  [MA07-1]  146.21,36 90 top
J3  14011213102000  [14011213102000]  139.98,5.38 180 top
J4  3-641215-2  [3-641215-2]  48.51,98.17 0 top
J7  SS-6566-NF  [SS-6566-NF]  79.11,95 180 top
J8  TSW-108-07-G-D  [MA08-2]  161.27,11.15 90 top
J9  SS-6566-NF  [SS-6566-NF]  102.11,95 180 top
J10  CCM03-3504LFT-NR  [CCM03-3504LFT-NR]  160.11,38.5 270 top
J11  [MA05-1]  132.31,49.6 0 top
J12  [MA05-1]  96.79,14.59 180 top
J14  3-641215-2  [3-641215-2]  116.11,97.5 180 top
J15  1990834  [1990834]  3.94,55.88 270 top
J16  1990737  [1990737]  3.81,10.92 270 top
J17  14011213102000  [14011213102000]  5.59,85.22 90 top
J18  14011213102000  [14011213102000]  33.88,5.61 180 top
J19  14011213102000  [14011213102000]  69.88,5.61 180 top
J30  22-11-2072  [HRXL-MAXSONAR-WRC-MB7387]  119.61,95.5 0 top
J41  [MA06-1]  149.15,98.19 0 top
J45  3-641215-4  [3-641215-4]  52.99,22.03 270 top
J47  DF11-10DP-2DSA(01)  [DF11-10DP-2DSA]  36.23,98.39 0 top
J48  3-641215-2  [3-641215-2]  22.06,99.08 180 top
J49  3-641215-2  [3-641215-2]  18.9,79.54 270 top
J50  0039301040  [0039301040]  14.25,62.45 270 top
JP1  [1X08-LOCK]  149.61,37.34 90 top
L1  HI1206T500R-00  [1206]  97.65,78.05 90 top
L2  HI1206T500R-00  [1206]  100.57,78.05 90 top
L3  NRS8030T150MJGJ  [NRS8030]  115.41,83.2 0 top
L11  SER2013-472MLD  [L_SER20XX]  111.73,59.74 270 top
L12  SRR1280-150M  [L_SRR1280]  92.96,51.32 270 top
L14  CR75NP-220KC  [CR75]  62.52,70.78 270 top
L15  HI1812V101R-10  [L1812]  54.99,92.65 0 top
L16  HI1812V101R-10  [L1812]  44.43,92.65 180 top
L17  HI1206T500R-00  [1206]  70.98,77.21 180 top
Q2  FDC6330L  [SSOT-6]  92.3,76.25 180 top
Q3  SR3.3.TCT  [SOT-143]  106.51,74.57 270 top
Q4  7B-28.63636MAAJ-T  [7B]  113.01,33.9 0 top
Q5  FDC6330L  [SSOT-6]  69.85,20.83 270 top
Q6  CM519 32.768KDZF-UT  [CM519]  152.01,67.9 0 top
Q7  SSM6P49NU,LFPZ  [MICRO_FET]  111.81,24.6 270 top
Q14  MAX9938HEUK  [SOT23-5]  65.93,39.47 0 top
Q15  SI4564DY  [SO-08]  59.81,41.16 270 top
Q16  CSD87331Q3D  [SON8_3.3X3.3_TI]  97,61.71 270 top
Q18  SI4564DY  [SO-08]  58.71,31.85 270 top
Q19  CSD87331Q3D  [SON8_3.3X3.3_TI]  92.06,42.04 0 top
Q20  IPD30N06S2L-23  [TO252]  37.24,41.17 180 top
Q21  IPD30N06S2L-23  [TO252]  40.85,23.16 90 top
Q23  FDN352AP  [SOT-23]  57.32,64.78 180 top
Q24  BSS138  [SOT23]  38.41,70.75 0 top
R1  300R  [0603]  133.6,44.32 90 top
R2  100K  [0603-ARRAY]  88.04,15.48 0 top
R3  1M  [0603]  95.21,77.01 270 top
R4  1M  [0603]  92.42,80.22 270 top
R5  1M  [0603]  90.53,72.47 90 top
R6  1M  [0603]  90.17,80.22 90 top
R7  100K  [0603]  140.05,41.53 0 top
R8  3.57K  [0603]  140.05,40.01 0 top
R9  1M  [0603]  106.38,77.27 180 top
R10  1M  [0603]  103.68,76.47 90 top
R11  1M  [0603]  100.84,74.3 0 top
R12  470K  [0603-0RTOP]  121.91,18.7 0 top
R13  0R  [0603-0RTOP]  121.91,16.9 180 top
R14  33K  [0603]  128.11,52.1 0 top
R15  0R  [0603-0RTOP]  79.85,17.4 90 top
R16  10K  [0603-0RTOP]  133.29,64.3 90 top
R17  10K  [0603-0RTOP]  135.19,64.3 90 top
R18  649R  [0603]  69.6,18.29 0 top
R19  649R  [0603]  69.6,16.64 0 top
R20  100K  [0603-ARRAY]  73.79,21.08 270 top
R21  100K  [0603-ARRAY]  73.79,17.53 270 top
R22  1M  [0603]  145.41,67.3 0 top
R23  10K  [0603-0RTOP]  128.51,91.4 270 top
R24  1M  [0603]  135.31,59.6 180 top
R25  0.22R  [0603-0RTOP]  114.61,89.4 180 top
R27  649R  [0603]  77.85,20.7 0 top
R28  649R  [0603]  78.61,23.11 90 top
R29  100K  [0603-ARRAY]  81.41,21.21 0 top
R31  10K  [0603]  29.49,48.13 0 top
R32  10K  [0603]  29.49,49.78 0 top
R33  4.7K  [0603]  20.73,49.91 180 top
R34  1K  [0603]  20.73,48.26 0 top
R35  3k  [0603]  29.49,46.48 0 top
R36  1k  [0603]  25.17,44.07 270 top
R37  300R  [0603]  119.76,49.78 0 top
R38  1K  [0603]  30.25,44.07 270 top
R39  1K  [0603]  22.63,44.2 270 top
R40  0.025R  [0805]  63.24,47.7 180 top
R41  0.025R  [0805]  63.24,45.6 180 top
R42  0.025R  [0805]  77.92,61.58 0 top
R43  0.025R  [0805]  77.92,63.8 0 top
R44  0.025R  [0805]  61.39,27.24 270 top
R45  470R  [0603]  59.03,21.98 90 top
R46  470R  [0603]  57.29,20.33 90 top
R151  470R  [0603]  139.16,90.29 90 top
R152  470R  [0603]  140.96,90.29 90 top
R154  0.025R  [0805]  65.81,43.48 0 top
R156  1M  [R0603]  54.48,40.09 90 top
R157  10  [R0603]  74.9,59.19 90 top
R158  10  [R0603]  82.4,59.29 90 top
R159  1M  [R0603]  59.79,36.96 180 top
R160  178k,1%  [R0603]  94.4,65.41 180 top
R161  0  [R0603]  92.2,63.08 180 top
R162  10k  [R0603]  59.67,45.6 180 top
R163  0  [R0603]  92.2,60.98 180 top
R164  5.90k,1%  [R0603]  81,51.29 180 top
R165  93.1k,1%  [R0603]  83.3,54.19 180 top
R166  20.0k,1%  [R0603]  98.1,65.31 0 top
R167  100k  [R0603]  77.56,50.04 270 top
R170  1M  [0603]  53.16,31.18 180 top
R171  10  [R0603]  79.86,42.74 90 top
R172  10  [R0603]  84.96,42.74 90 top
R173  1M  [0603]  58.41,28.25 0 top
R174  1M  [0603]  53.91,33.75 90 top
R175  3.3K  [0805]  29.03,38.89 90 top
R176  3.3K  [0805]  38.47,31.23 0 top
R177  178k,1%  [R0603]  95.76,33.04 90 top
R178  0  [R0603]  88.16,39.04 270 top
R179  10k  [R0603]  54.81,36.85 0 top
R180  0  [R0603]  93.36,33.04 270 top
R181  5.90k,1%  [R0603]  82.16,34.14 0 top
R182  93.1k,1%  [R0603]  79.26,38.74 270 top
R183  1M  [0603]  42.26,45.17 0 top
R184  1M  [0603]  48.37,21.63 90 top
R185  20.0k,1%  [R0603]  82.06,32.04 0 top
R186  100k  [R0603]  86.06,39.04 90 top
R187  47K  [0603]  50.01,40.45 180 top
R189  0.047R  [0805]  53.82,64.48 90 top
R190  47K  [0603]  50.11,35.75 0 top
R193  10K  [0603]  44.12,68.68 0 top
R194  3.09M  [0603]  48.62,64.68 90 top
R197  1M  [0603]  46.72,64.68 270 top
R198  10  [R0603]  70.06,93.57 90 top
R199  0R  [R0603]  63.36,85.57 90 top
R200  1M  [R0603]  61.06,82.37 0 top
R201  1M  [R0603]  61.06,80.17 0 top
R202  DNP  [R0603]  64.76,82.37 0 top
R203  DNP  [R0603]  64.76,80.17 0 top
R204  1k  [R0603]  58.06,85.97 270 top
R205  100k  [R0603]  60.06,85.97 270 top
R206  33  [R0603]  53.82,83.62 180 top
R207  3.3k  [R0603]  38.53,81.74 180 top
R208  6.8k  [R0603]  38.53,79.64 0 top
R209  120k  [R0603]  35.69,77.04 270 top
R210  1M  [R0603]  34.79,69.94 180 top
R211  3.9k  [R0603]  34.79,72.34 0 top
TP1  [SMD_ROUND_1MM]  116.81,44 0 top
TP2  [SMD_ROUND_1MM]  116.16,36.42 0 top
TP3  [SMD_ROUND_1MM]  130.11,46.5 0 top
TP4  [SMD_ROUND_1MM]  128.11,46.48 0 top
TP5  [SMD_ROUND_1MM]  126.65,46.48 0 top
TP7  [SMD_ROUND_1MM]  152.71,55.9 0 top
TP8  [SMD_ROUND_1MM]  113.1,26.48 180 top
TP9  [SMD_ROUND_07MM]  155.44,63.09 90 top
TP11  [SMD_ROUND_07MM]  108.56,45.6 90 top
TP12  TP_0812  [TP_0.8_1.2]  106.66,45.6 0 top
TP60  [SMD_ROUND_07MM]  152.51,94.21 270 top
TP61  TPB1,27  [B1,27]  57.19,76.01 0 top
TP62  TPB1,27  [B1,27]  101.28,48.59 0 top
TP63  TPB1,27  [B1,27]  24.33,34.41 0 top
TP64  TPB1,27  [B1,27]  48.51,56.26 0 top
TP65  TPB1,27  [B1,27]  77.74,71.91 0 top
TP66  TPB1,27  [B1,27]  48.51,48.9 0 top
TP67  TPB1,27  [B1,27]  80.54,71.91 0 top
TP69  [P1-13@1]  57.76,81.57 0 top
U1  LTC1955  [LFCSP_5X5_032]  116.71,16.2 0 top
U2  LE33  [LE33]  54.19,52.64 270 top
U3  ADS1015  [MSOP10]  25.06,47.15 270 top
U6  TPS43061  [QFN16_3X3_EP]  78.6,54.89 180 top
U7  TPS43061  [QFN16_3X3_EP]  86.96,34.24 0 top
U8  TPA3111D1PWP  [TSSOP28_EP]  63.66,91.77 90 top
U9  OPA322SAIDBVT  [SOT23-6']  38.69,75.68 180 top
X1  FH12-10S-0.5S1.00MM  [CON-FPC-1.0MM-10POS]  104.47,6.64 0 top
X2  MINI-USB_4P-85-32004-10X  [85-32004-10X]  161.8,88.27 180 top

## Library data of the parts
B1 = Keystone
C1-C42 C47 C48 C59 C114 C115 C121 C134 C135 C142 C149 C150 C152-C158 C160 C163 C164 C172 D17 D19 D23 D24 L1 L2 L17 R1 R3-R19 R22-R25 R27 R28 R31-R46 R151 R152 R154 R170 R173-R176 R183 R184 R187 R189 R190 R193 R194 R197 = discrete
C43 C44 C187 = resistor
C122 C123 C128-C130 C136 C137 C180 C181 = Brenneman; MANUFACTURER: Samsung; MFR_PN: CL31A226KAHNNNE
C124 C138 = Brenneman; MANUFACTURER: Samsung; MFR_PN: CL10C101JB8NCNC
C125 C126 C132 C139 C140 C147 = Brenneman; MANUFACTURER: Murata; MFR_PN: GRM188R71H104KA93D
C127 C141 = Brenneman; MANUFACTURER: Samsung; MFR_PN: CL10A475KA8NQNC
C131 = Brenneman; MANUFACTURER: Samsung; MFR_PN: CL10C131JB8NNNC
C133 C174 C175 C177 = Brenneman; MANUFACTURER: Samsung; MFR_PN: CL10B153KB8NNNC
C143-C145 C171 = Brenneman; MANUFACTURER: Samsung; MFR_PN: CL32B106KBJNNWE
C146 = Brenneman; MANUFACTURER: Samsung; MFR_PN: CL10C101JB8NNNC
C148 = Brenneman; MANUFACTURER: Samsung; MFR_PN: CL10B103KB8NNNC
C165 C166 = Brenneman; MANUFACTURER: Kemet; MFR_PN: EEV227M016A9HAA
C167 C168 C182-C186 Q24 R200-R211 = Brenneman
C169 C170 C176 C179 = Brenneman; MANUFACTURER: Samsung; MFR_PN: CL10B102KB8NNNC
C173 C178 = Brenneman; MANUFACTURER: Taiyo Yuden; MFR_PN: TMK107B7474KA-TR
D1 Q20 Q21 = InfineonTech-AON
D2 D3 D27 = st-microelectronics-AOM
D4 D20 D22 D30 IC5 IC7 = NXP-AOM
D21 D28 D31 = DiodesInc-AON
D25 D26 Q15 Q18 = Vishay-AON
D32 F3 = Littelfuse
DRILEGEND = drilegend
FID1-FID3 = technol
H1-H6 = SparkFun-Hardware
IC1 = Intersil-U
IC2 IC9 = TexasInstruments-AON
IC3 IC4 IC6 IC19 = Microchip-AON
IC8 = Micron-U
IC18 = FTD-AON
IC21 U1 = LinearTech-AON
J1 J47 = CON-Hirose-AON
J2 J8 J11 J12 J41 = CON-pinHeader-AON
J3 J15-J19 J50 U2 = elock_lib
J4 J14 J45 J48 J49 = Tyco-U
J7 J9 = Stewart
J10 = C&K_Components-U
J30 = elocktech_lib
JP1 = adafruit
L3 = Taiyo-Yuden-U
L11 = Brenneman; MANUFACTURER: Coilcraft; MFR_PN: SER2013-472ML
L12 = Brenneman; MANUFACTURER: Bourns; MFR_PN: SRR1280-1x0M
L14 = Sumida-UT
L15 L16 = Brenneman; MANUFACTURER: Laird; MFR_PN: HI1812V101R-10
Q2 Q5 Q23 = Fairchild-AON
Q3 = Semtech-AOM
Q4 = TXC_Tech-U
Q6 = Citizen
Q7 = Toshiba-AON
Q14 = Touchstone-U
Q16 Q19 = Brenneman; MANUFACTURER: TI; MFR_PN: CSD87331Q3D
R2 R20 R21 R29 = Panasonic-AON
R156 R159 R167 R186 = Brenneman; MANUFACTURER: Panasonic; MFR_PN: ERJ-3GEYJ104V
R157 R158 R171 R172 R198 R199 = Brenneman; MANUFACTURER: Rohm; MFR_PN: MCR03ERTJ100
R160 R177 = Brenneman; MANUFACTURER: Panasonic; MFR_PN: ERJ-3EKF1783V
R161 R163 R178 R180 = Brenneman; MANUFACTURER: Panasonic; MFR_PN: ERJ-3GEY0R00V
R162 R179 = Brenneman; MANUFACTURER: Panasonic; MFR_PN: ERJ-3GEYJ103V
R164 = Brenneman; MANUFACTURER: Panasonic; MFR_PN: ERJ-3EKF5901V
R165 = Brenneman; MANUFACTURER: Panasonic; MFR_PN: ERJ-3EKF9312V
R166 R185 = Brenneman; MANUFACTURER: Panasonic; MFR_PN: ERJ-3EKF2002V
R181 R182 = Brenneman; MANUFACTURER: Panasonic; MFR_PN: ERJ-3EKFxxxxV
TP1-TP5 TP7-TP9 TP11 TP12 TP60-TP67 TP69 = testpad
U3 = SparkFun-AnalogIC; PROD_ID: IC-12239
U6 U7 = Brenneman; MANUFACTURER: TI; MFR_PN: TPS43061RTE
U8 = Brenneman; MANUFACTURER: TI; MFR_PN: TPA3111D1PWP
U9 = Brenneman; MANUFACTURER: TI; MFR_PN: TPA322SAIDBV
X1 = con-hirose
X2 = con-cypressindustries; OC_FARNELL: unknown; OC_NEWARK: unknown

## Nets
3V3_AUD: C180.1 C181.1 C182.1 R206.1 R207.1 U9.6
5V_ON: C163.1 IC3.92 IC21.1
18V_GND: C39.2 C40.1 R34.1 R39.1 U3.5
18V_SENSE: J15.1 J15.1A J15.3 J15.3A R33.2
+3.3V: C1.1 C2.1 C5.1 C6.1 C8.1 C9.1 C16.2 C17.1 C29.2 C157.1 D1.2 D27.+ D31.4 D31.5 IC3.2 IC3.16 IC3.37 IC3.46 IC3.62 IC3.86 J1.9 J8.10 J11.2 Q7.1 Q7.4 R1.2 R2.7 R2.8 R12.2 R14.2 R15.2 R37.2 R167.2 R186.2 R187.2 R190.2 TP9.P$1 TP64.TP U1.1 U1.12 U1.13 U2.1
+3.3V/1: C22.1 C33.1 C37.1 C48.1 IC5.7 IC5.8 IC6.8 IC8.3 IC8.7 IC8.8 J49.2 Q7.6 Q7.P1 R16.2 R17.2 R24.1 R31.2 R32.2 R200.1 R201.1 R205.2 R206.2 TP8.P$1 U3.8
+3.3V/2: C14.1 C35.2 IC2.8 J2.2 J18.10 J30.6 JP1.2 Q7.3 Q7.P2 R11.2
+5V: C149.1 C150.1 C156.1 C158.1 C160.2 D28.+ L14.2 R194.1 TP65.TP U2.8
+SMB: C11.1 C27.1 C28.1 C135.1 C152.1 C153.1 C154.1 C155.1 D2.A IC9.5 IC21.6 IC21.8 J1.10 J7.2 J9.2 Q2.4 Q5.4 Q14.4 Q15.3 Q18.3 R3.1 R20.6 R40.2 R41.2 R154.2 R156.2 R170.1 R189.2
+SMB_PRE: F3.1 J15.9 J15.9A J45.4
/3.3V1_ON: IC3.95 Q7.2
/3.3V2_ON: IC3.94 Q7.5
/3.3V3_ON: IC3.61
/CL_CS1: IC3.1
/CL_CS2: IC3.17 J1.7
/CTS: IC18.11 J41.2
/FMEM1_CS: IC3.28 IC8.1 R24.2
/MCLR: IC3.13 IC4.4 J11.1 R14.1
/MCLR2: IC4.6 J12.1
/RAM_CS: IC3.3 J8.13
/RTS: IC18.3 J41.6
/SM_FAULT: IC3.21 U1.24
/XB_RESET: IC3.18 J2.6 JP1.7
A1: J7.3 J9.3 L2.2
A+: IC2.6 L2.1 Q3.3 R9.1 R11.1
ACT_EN_B: IC3.54
ACT_S1_B: IC3.52 Q20.1 R183.1
ACT_S2_B: IC3.53 Q21.1 R184.1
ACT_S3_B: IC3.88
ACT_S4_B: IC3.49
AGND: C165.2 C166.2 C167.2 C168.2 C169.2 C170.2 C171.2 C172.2 C176.2 C177.1 C179.2 C180.2 C181.2 C182.2 J17.1 J17.3 J17.6 J17.9 J17.12 J47.3 J47.4 J48.1 L17.2 Q24.2 R202.2 R203.2 R210.2 R211.2 U8.3 U8.4 U8.8 U8.19 U8.24 U8.EP U9.2
AUD_AMP_FAULT#: R204.1 R205.1 U8.1 U8.2
AUD_AMP_G0: IC3.41 R200.2 R202.1 TP4.P$1 U8.5
AUD_AMP_G1: IC3.42 R201.2 R203.1 TP5.P$1 U8.6
AUD_AMP_INN: C177.2 U8.11
AUD_AMP_INP: C174.2 C175.2 U8.12
AUD_AMP_SD#: R204.2 TP69.1
AUD_BSN: C178.1 U8.22 U8.26
AUD_BSP: C173.1 U8.17 U8.21
AUD_GVDD: C172.1 U8.9 U8.10
B1: J7.4 J9.4 L1.2
B12_BOOT: C126.1 U6.11
B12_COMP: C131.1 R164.2 U6.3
B12_FB: R160.1 R166.2 U6.4
B12_FEED: L11.2 R42.2 R43.2 R158.2
B12_HDRV: R161.2 U6.13
B12_HG: Q16.3 R161.1
B12_ISNS+: C124.1 R157.1 U6.6
B12_ISNS-: C124.2 R158.1 U6.5
B12_L: D20.A L11.1 Q16.6 Q16.7 Q16.8
B12_LDRV: R163.2 U6.8
B12_LG: Q16.5 R163.1
B12_PG: IC3.69 R167.1 U6.14
B12_RC: C133.1 R164.1
B12_RT: R165.2 U6.1
B12_SS: C132.1 U6.2
B12_SW: C126.2 Q16.4 U6.12
B12_VCC: C127.1 U6.10
B-: IC2.7 L1.1 Q3.2 R9.2 R10.2
BAT_GND: C41.2 C42.1 R36.1 R38.1 U3.7
BAT_SENSE: J15.5 J15.5A J15.7 J15.7A R35.2
BTN_1: IC4.1 J12.4 J19.10 R2.2 R2.3
BTN_1PIN_B: C12.1 IC3.90 R2.6
BTN_2: IC4.3 J12.5 J19.12 R2.1 R2.4
BTN_2PIN_B: C13.1 IC3.89 R2.5
CL_IRQ: IC3.20 J1.4
CM_RST: IC3.98
CON_LED: IC3.40 JP1.6
DCDC12VIN: C122.1 C123.1 C125.1 Q15.5 Q15.6 R42.1 R43.1 R157.2 U6.7
DCDC_12V_EN: IC3.84 Q15.2 R162.2 U6.15
DGND: B1.- C1.2 C2.2 C3.2 C4.2 C5.2 C6.2 C7.2 C8.2 C9.2 C10.1 C11.2 C12.2 C13.2 C14.2 C16.1 C17.2 C18.1 C19.1 C20.1 C21.2 C22.2 C23.2 C24.2 C25.2 C26.2 C27.2 C28.2 C29.1 C32.2 C33.2 C34.2 C35.1 C36.2 C37.2 C38.1 C40.2 C42.2 C43.- C44.- C47.2 C48.2 C59.2 C114.1 C115.1 C121.1 C122.2 C123.2 C125.2 C127.2 C128.2 C129.2 C130.2 C131.2 C132.2 C133.2 C134.2 C135.2 C136.2 C137.2 C139.2 C141.2 C142.2 C143.2 C144.2 C145.2 C146.2 C147.2 C148.2 C149.2 C150.2 C152.2 C153.2 C154.2 C156.2 C157.2 C158.2 C163.2 C164.2 C187.- D4.A D21.- D27.- D28.- D30.A D31.1 D31.2 D32.A H1.P1 H2.P1 H3.P1 H4.P1 H5.P1 IC1.3 IC2.5 IC3.15 IC3.31 IC3.36 IC3.45 IC3.65 IC3.75 IC4.2 IC5.4 IC5.5 IC5.6 IC6.1 IC6.2 IC6.3 IC6.4 IC6.7 IC7.7 IC7.12 IC8.4 IC9.2 IC18.7 IC18.18 IC18.21 IC18.25 IC18.26 IC19.4 IC21.4 J1.1 J2.1 J3.7 J3.8 J7.1 J7.6 J8.9 J9.1 J9.6 J10.C5 J11.3 J12.3 J15.10 J15.10A J18.9 J19.1 J19.3 J19.5 J19.7 J19.9 J19.11 J30.7 J41.1 J45.1 J50.1 J50.2 JP1.1 L17.1 Q2.1 Q3.1 Q5.1 Q14.1 Q14.2 Q15.1 Q16.EP Q18.1 Q19.EP Q20.2 Q21.2 R5.1 R6.1 R10.1 R13.1 R20.2 R21.5 R21.6 R22.1 R25.1 R29.5 R29.6 R162.1 R165.1 R166.1 R174.2 R179.1 R182.1 R183.2 R184.2 R185.1 R197.2 TP11.P$1 TP12.1 TP66.TP TP67.TP U1.9 U1.10 U1.21 U1.PAD U2.2 U2.3 U2.5 U2.6 U2.7 U3.3 U6.9 U6.16 U6.EP U7.9 U7.16 U7.EP X1.7 X1.8 X2.4
DIN_SM: IC3.6 U1.27
DOOR2_L: IC3.50 R29.2 R29.3
DOOR2_L_SW: C36.1 J19.2 R27.2 R29.7
DOOR2_R: IC3.55 R29.1 R29.4
DOOR2_R_SW: C47.1 J19.4 R28.2 R29.8
DOOR_L: IC3.73 R21.2 R21.3
DOOR_L_SW: C25.1 J19.6 R18.2 R21.7
DOOR_ON: IC3.87 Q5.5 R20.7
DOOR_R: IC3.91 R21.1 R21.4
DOOR_R_SW: C26.1 J19.8 R19.2 R21.8
DOUT_SM_B: IC3.7 U1.28
ID1_L_N: C31.2 IC9.3 J14.1 J18.8 R25.2
ID_L_P: C31.1 C32.1 D3.A J14.2 J18.7 L3.2
ID_PWM: IC3.51 R23.1
IOB: J10.C7 U1.20
ISEN_OP_EN: C134.1 IC3.68 IC19.8
ISENSEA: IC3.43 IC19.1 IC19.2
ISENSEB: IC3.44
LCD_SI: IC3.32
LD_SM: IC3.9 U1.25
MIC_AMP_EN: IC3.96 J49.1 Q24.1 R210.1 U9.5
MICROPHONE: J17.2 J48.2 R207.2 R208.1 U9.3
N$1: C10.2 C38.2 IC3.85
N$2: C20.2 U1.15
N$3: B1.+ D1.1 TP7.P$1
N$5: J15.6 J15.6A J15.8 J15.8A R38.2
N$6: IC21.5 Q23.1
N$7: J10.C2 U1.19
N$8: C19.2 IC3.64 Q4.1
N$9: C187.+ D32.C F3.2 Q14.5 R40.1 R41.1 R154.1 TP63.TP
N$10: IC19.3 Q14.3
N$11: IC21.2 R193.2
N$13: C15.1 U1.11
N$14: C15.2 U1.14
N$16: C24.1 D1.3 IC7.14
N$17: C164.1 R193.1
N$18: R12.1 U1.23
N$19: C39.1 R33.1 R34.2 U3.4
N$20: D30.K L14.1 Q23.3
N$21: C41.1 R35.1 R36.2 U3.6
N$22: IC7.1 Q6.2
N$23: IC7.2 Q6.1
N$24: C155.2 IC21.7 Q23.2 R189.1
N$25: R13.2 U1.22
N$26: Q15.4 R156.1 R159.2
N$28: J10.C3 U1.18
N$32: C160.1 IC21.3 R194.2 R197.1
N$34: J10.C1 U1.17
N$35: Q5.6 R20.3
N$36: C18.2 IC3.63 Q4.3
N$39: C23.1 C59.1 IC1.1 R37.1
N$40: Q5.2 Q5.3 R18.1 R19.1 R27.1 R28.1
N$41: J15.2 J15.2A J15.4 J15.4A R39.2
N$42: J45.2 R46.2
N$43: C21.1 IC4.5 J12.2 R15.1
N$44: IC3.34 TP3.P$1
N$45: D23.2 R175.1
N$46: D24.2 R176.1
N$47: J45.3 R45.2
N$49: C3.1 C7.1 IC3.30 R1.1
N$51: Q18.4 R170.2 R173.1
N$52: R199.1 U8.14
N$55: IC3.60 TP2.P$1
N$62: C171.1 R198.1 R199.2 U8.7
N$63: C34.1 IC9.4 R23.2
N$64: C30.2 D4.K IC9.6 L3.1
N$66: C30.1 D2.C D3.C IC9.1
N$68: C185.2 R211.1
N$69: C185.1 C186.1 R209.2 U9.4
N$70: C183.1 C184.1 C186.2 R209.1 U9.1
N$71: Q24.3 R208.2
N$72: C121.2 IC18.4 IC18.17 TP60.P$1
N$73: Q15.7 Q15.8 R159.1
N$74: Q18.7 Q18.8 R173.2
N$99: Q2.6 R3.2
N$134: D17.1+ IC18.22
N$135: D19.1+ IC18.23
N$136: D17.2 R151.1
N$137: D19.2 R152.1
OUT_S1: D23.1+ D25.A J15.12 J15.12A Q20.3
OUT_S2: D24.1+ D26.A J16.2 J16.2A Q21.3
OUTN_UNF: C178.2 L16.2 U8.23 U8.25
OUTP_UNF: C173.2 L15.2 U8.18 U8.20
P12V: C44.+ C128.1 C129.1 C130.1 C165.1 C166.1 C167.1 C168.1 C169.1 C170.1 D20.K J50.3 J50.4 Q16.1_2 R160.2 R198.2 TP61.TP U8.15 U8.16 U8.27 U8.28
PGC: IC3.26 J11.5
PGD: IC3.27 J11.4
PHOTO_PIN: IC3.24 R8.1
PHOTO_PWR: IC3.25 R7.1
PHOTOCELL: R7.2 R8.2
PIC_INT: IC3.38 J1.3
RTC_CS: IC3.79 IC7.6 R22.2
RTC_INT: IC3.80 IC7.5
SBC_5V_VBUS: C114.2 C115.2 IC18.19 IC18.20 J41.3 R151.2 R152.2 X2.1
SBC_LINL: C184.2 J17.4 J47.6
SBC_LINR: C183.2 J17.5 J47.2
SBC_LOUTL: C175.1 J17.7 J47.5
SBC_LOUTR: C174.1 J17.8 J47.1
SBC_USB_B_D_N: IC18.16 X2.2
SBC_USB_B_D_P: IC18.15 X2.3
SCL1: IC3.57 IC5.2 IC6.6 J8.16 R16.1 R32.1 U3.1 U3.10
SCLK1: IC3.77 IC7.10 IC8.6
SCLK2: IC3.10 J1.5 J8.12 U1.31
SCLK_SM_B: IC3.8 U1.26
SDA1: IC3.56 IC5.1 IC6.5 J8.15 R17.1 R31.1 U3.9
SDI1: IC3.72 IC7.8 IC8.2
SDI2: IC3.11 J1.8 J8.11
SDO1: IC3.76 IC7.9 IC8.5
SDO2: IC3.12 J1.6 J8.14
SM_C4A: J3.2 U1.4 X1.2
SM_C8A: J3.1 U1.3 X1.1
SM_CLK_A: J3.4 U1.7 X1.4
SM_DATA: IC3.14 U1.29
SM_DET_A: J3.10 U1.2 X1.10
SM_IO_A: J3.3 U1.5 X1.3
SM_RST: IC3.5 U1.30
SM_RST_A: J3.6 U1.6 X1.6
SM_SYNC: IC3.4 U1.32
SM_VCC_A: J3.9 U1.8 X1.9
SMB_SCL: D31.6 IC3.66 R46.1 R190.1
SMB_SDA: D31.3 IC3.67 R45.1 R187.1
SNDR: IC3.35
SPKR1_P: C176.1 J4.1 J17.11 L15.1
SPKR_N: C179.1 J4.2 J17.10 L16.1
STR_BOOT: C140.1 U7.11
STR_COMP: C146.1 R181.2 U7.3
STR_FB: R177.1 R185.2 U7.4
STR_FEED: L12.2 R44.2 R172.2
STR_HDRV: R178.2 U7.13
STR_HG1: Q19.3 R178.1
STR_ISNS+: C138.1 R171.1 U7.6
STR_ISNS-: C138.2 R172.1 U7.5
STR_L: D22.A L12.1 Q19.6 Q19.7 Q19.8
STR_LDRV: R180.2 U7.8
STR_LG1: Q19.5 R180.1
STR_PG: IC3.74 R186.1 U7.14
STR_RC: C148.1 R181.1
STR_RT: R182.2 U7.1
STR_SS: C147.1 U7.2
STR_SW: C140.2 Q19.4 U7.12
STR_VCC: C141.1 U7.10
STRIKE_EN: IC3.47 Q18.2 R174.1 R179.2 U7.15
U1RX: IC3.70 IC18.1 J41.4
U1TX: IC3.71 IC18.5 J41.5
U2CTL: IC2.2 IC2.3 IC3.19
U2RX: IC2.1 IC3.81
U2TX: IC2.4 IC3.82
U3RX: IC3.23 J2.3 JP1.3
U3TX: IC3.33 J2.4 JP1.4
US-S_O: IC3.78 J18.11 J30.5
USRF_EN: IC3.97 J18.12 J30.4
VACT: C43.+ C142.1 C143.1 C144.1 C145.1 D21.+ D22.K D25.C D26.C J15.11 J15.11A J16.1 J16.1A Q19.1_2 R175.2 R176.2 R177.2 TP62.TP
VPS_ON: IC3.100 Q2.5 R5.2
VPS_PWR: J7.5 J9.5 Q2.2 Q2.3 R4.2
VPS_SEN: IC3.99 R4.1 R6.2
VREF2.5: C4.1 IC1.2 IC3.29 TP1.P$1
VSOLAR: J1.2
VSUPLYACT: C136.1 C137.1 C139.1 Q18.5 Q18.6 R44.1 R171.2 U7.7
XB_RTS: IC3.48 J2.7
XB_SLEEP: IC3.22 J2.5 JP1.5

## Tracks (layer width: path | path; a pad name or v marks a point on that pad's centre or on a via)
3V3_AUD  (via drill 0.3)
  Top 0.203: U9.6 39.64,73.18 v39.67,73.15 | C181.1 55.85,88.12 v56.69,88.95 | R207.1 39.38,83.36 v39.59,83.57
  Top 0.762: C180.1 54.32,82.06 54.63,82.37 54.63,83.58 R206.1 C182.1 54.67,87.97 C181.1
  SUPPLY 0.203: v39.67,73.15 39.67,82.73 39.95,83.01 | 39.95,83.01 51.33,83.01 56.71,88.39 56.71,88.92 v56.69,88.95 | v39.59,83.57 39.59,83.36 39.95,83.01
5V_ON  (via drill 0.3)
  Top 0.152: IC3.92 130.01,28.78 129.02,29.77 v128.16,29.77
  Top 0.203: C163.1 44.91,70.25 45.77,69.39 IC21.1 49.37,69.39 v49.73,69.04
  Top 0.356: 44.91,72.68 C163.1
  SUPPLY 0.152: v128.16,29.77 127.76,29.77 127.54,30 127.06,30 126.78,29.72 115.84,29.72 109.16,36.4 109.16,37.92 v109.34,38.1 | v107.64,38.84 107.64,47.45 v107.78,47.59
  Bottom 0.152: v109.34,38.1 108.37,38.1 v107.64,38.84
  Bottom 0.203: v49.73,69.04 50.72,68.04 50.77,68.04 51.12,67.69 51.12,67.33 54.46,63.99 56.81,66.34 97.17,66.34 99.51,64.01 99.51,52.91 101.14,51.28 104.08,51.28 v107.78,47.59
18V_GND
  Top 0.305: U3.5 22.42,46.15 22.25,45.97 22.25,45.11 22.12,44.98
  Top 0.762: R39.1 22.12,44.98 C40.1 20.32,44.98 19.94,45.36 C39.2 R34.1
18V_SENSE  (1 unrouted)
  Top 2: J15.3A J15.3 | J15.1A J15.1
  Bottom 2: J15.3A 9.91,51.11 9.91,55.5 10.29,55.88 J15.1A
+3.3V  (via drill 0.3, 0.51, 0.61)  (5 unrouted)
  Top 0.152: IC3.86 127.61,26.02 128.47,25.17 C6.1 129.03,23.52 v129.66,23.52 | U1.13 U1.12 116.46,12.83 116.59,12.7 116.59,10.41 116.36,10.19 C16.2 | C9.1 119,35.4 v118.97,35.43 | R12.2 122.7,20.42 v123.13,20.85 | D1.2 154.89,60.94 v155.41,61.47 | R2.7 R2.8 86.36,16.38 86.23,16.51 86.23,18.54 v86.11,18.67 | R15.2 79.15,18.19 78.99,18.03 v78.99,15.24
  Top 0.203: R186.2 86.06,40.98 86.4,41.33 v86.4,41.81 | C5.1 138.22,35.1 137.81,35.51 136.37,35.51 135.96,35.1 IC3.16 134.1,35.1 v133.67,34.67 | C1.1 137.93,27.73 v138.02,27.64 138.02,27.26 138.85,26.43 138.85,23.01 v139.11,22.76 | C8.1 128.3,42.61 v127.86,43.05 | C2.1 125.25,43.36 v125.95,44.07 | R1.2 133.6,46.13 v133.95,46.48
  Top 0.229: IC3.2 136.2,29.5 136.8,28.9 C1.1 | IC3.62 C9.1 | IC3.46 125.21,42.39 125.01,42.59 C2.1 | IC3.37 128.81,41.6 129.01,41.8 C8.1 | Q7.4 113.56,23.95 114.11,24.5 C29.2
  Top 0.254: R167.2 77.56,47.75 v78.07,47.24 | TP64.TP 48.54,56.26 48.54,54.55 | J1.9 166.16,13.64 161.23,13.64 J8.10
  Top 0.279: U1.1 113.14,17.95 112.9,18.19 C17.1
  Top 0.305: R190.2 v50.89,34.44
  Top 0.356: R14.2 128.9,50.47 J11.2 | D31.4 D31.5 49.65,38.05 49.93,37.77 49.93,36.91 50.18,36.65 50.74,36.65 50.89,36.5 R190.2 | v47.97,40.44 47.99,40.45 R187.2 | C17.1 112.87,19.23 v112.87,20.32 | v109.44,25.27 109.46,25.25 Q7.1 | C29.2 114.53,23.63 114.1,23.2 v113.16,23.2 | R37.2 120.55,47.68 v120.49,47.62
  Top 0.406: TP9.P$1 155.44,61.49 v155.41,61.47
  Top 0.508: v113.25,21.84 113.23,21.82 108.55,21.82 107.69,20.95 v103.55,20.95 99.61,24.89 v97.92,24.89
  Top 1.27: D27.+ 68.75,52.71 68.29,52.25 67.25,52.25 C157.1 67.02,54.26 v66.29,54.99 | 48.54,54.55 U2.1 | v45.59,53.21 46.73,54.35
  SUPPLY 0.152: v118.97,35.43 118.97,37.34 120.36,38.73 120.36,39.62 119.6,40.39 119.09,40.39 117.95,41.53 117.95,42.8 118.33,43.18 118.33,45.47 v120.49,47.62 | v129.66,23.52 130.4,23.52 132.07,21.84 137.64,21.84 137.96,21.52 | 136.06,14.38 136.06,19.62 137.96,21.52 | 103.55,17.83 v103.55,20.95 | v116.17,21.82 115.79,22.2 114.11,22.2 113.76,21.84 v113.25,21.84 | 137.96,21.52 139.11,22.67 v139.11,22.76 | v78.99,15.24 78.99,14.73
  SUPPLY 0.203: v125.95,44.07 126.59,44.7 | v133.95,46.48 133.95,46.99 133.19,47.75 131.62,47.75 J11.2
  SUPPLY 0.254: v78.07,47.24 78.07,48.44
  SUPPLY 0.305: v50.89,34.44 50.89,37.52 v47.97,40.44 | v139.11,22.76 154.38,22.76 157.89,19.25 157.89,13.31 158.78,12.41 J8.10
  SUPPLY 0.356: v112.87,20.32 113.25,20.7 v113.25,21.84 113.25,23.11 v113.16,23.2 111.09,25.27 v109.44,25.27 | v133.67,34.67 131.03,34.67 129.89,35.81 129.89,37.72 129.13,38.48 125.06,38.48 122.01,35.43 v118.97,35.43
  SUPPLY 0.508: v86.4,41.81 88.38,39.83 88.38,36.85 92.53,32.72 96.54,32.72 97.54,31.72 97.54,25.27 v97.92,24.89
  SUPPLY 0.61: v86.4,41.81 79.77,48.44 78.07,48.44 71.7,48.44 70.43,49.71 v70.07,49.71 69.56,49.71 68.14,48.28 61.69,48.28 61.28,47.88 52.96,47.88 47.97,42.89 v47.97,40.44
  SUPPLY 0.762: v127.86,43.05 127.86,43.43 126.59,44.7 123.67,47.62 | v120.49,47.62 123.67,47.62 | 123.67,47.62 123.67,49.78 125.95,52.07 129.76,52.07 | 129.76,52.07 152.11,52.07 155.41,55.37 v155.41,61.47 | J11.2 129.77,52.06 129.76,52.07
  SUPPLY 1.016: v66.29,54.99 70.07,51.21 v70.07,49.71
  Bottom 0.152: v123.13,20.85 117.11,20.85 116.27,21.69 116.27,21.72 v116.17,21.82
  Bottom 0.203: v133.67,34.67 133.67,33.95 133.97,33.65 133.97,32.9 133.7,32.62 133.7,30.72 133.82,30.59 133.82,29.72 135.93,29.72 v138.02,27.64
  Bottom 1.27: v66.29,54.99 47.37,54.99 v45.59,53.21
+3.3V/1  (via drill 0.3)  (3 unrouted)
  Top 0.152: Q7.6 113.1,25.43 TP8.P$1 | v87.34,23.88 88.82,22.4 93.44,22.4 97.28,26.24 99.81,26.24 101.72,24.33 104.73,24.33 106.69,26.29 v109.62,26.29 | 32.81,66.98 34.75,66.98 v36.45,65.28 | v44.58,28.32 45.47,27.43 v48.61,27.43 | R31.2 30.4,48.01 v31.52,48.01
  Top 0.203: IC5.8 131.23,56.67 132.17,56.67 132.33,56.82 132.33,57.25 132.12,57.45 131.54,57.45 131.3,57.69 C22.1 131.3,59.4 131.46,59.56 132.68,59.56 134.05,60.94 136.06,60.94 136.1,60.89 R24.1 136.89,59.6 137.1,59.38 137.1,58.88 137.36,58.62 139.56,58.62 139.74,58.8 139.74,59.56 C33.1 | Q7.P1 111.85,25.14 111.85,25.91 111.47,26.29 v109.62,26.29 | v30.57,72.52 30.83,72.26 30.83,68.96 32.81,66.98
  Top 0.254: IC5.7 v128.98,56.01 v128.97,56.01 | 136.06,60.94 136.87,61.75 136.87,64.52 136.3,65.08 R17.2
  Top 0.305: U3.8 26.29,47.15 25.9,47.53 C37.1 25.93,49.83
  Top 0.356: Q7.6 111.96,25.25 Q7.P1 | IC8.7 141.18,56.63 141.44,56.9 141.44,57.72 141.25,57.91 | 141.25,57.91 IC8.8 | C33.1 140.96,59.6 141.25,59.31 141.25,57.91 | IC8.3 133.51,55.37 132.88,56.01 IC5.7 IC5.8 | R17.2 R16.2 132.36,65.08 132.15,64.87 132.15,62.53 131.87,62.25 IC6.8 | R206.2 52.97,83.48 52.16,82.68 50.51,82.68 v49.75,81.92 | R201.1 59.8,79.76 v56.61,79.76 | v25.93,53.06 25.93,51.44 C48.1 25.9,51.37 C37.1
  Top 0.762: R201.1 R200.1 60.06,82.52 R205.2 | R32.2 R31.2
  SUPPLY 0.254: v128.97,56.01 126.94,56.01 122.98,52.05 119.03,52.05 108.7,41.72 108.7,28.65 109.62,27.74 v109.62,26.29
  SUPPLY 0.356: J49.2 22.02,79.54 22.83,78.74 22.83,74.04 24.35,72.52 v30.57,72.52 36.16,72.52 36.92,71.75 40.1,71.75 40.73,72.39 40.73,75.95 46.7,81.92 v49.75,81.92 51.91,79.76 v56.61,79.76
  Bottom 0.152: 25.35,50.81 25.69,50.47 26.17,50.47 26.5,50.8 28.09,50.8 30.89,48.01 v31.52,48.01
  Bottom 0.203: v87.34,23.88 84.8,23.88 83.66,25.02 70.58,25.02 68.17,27.43 v48.61,27.43
+3.3V/2  (via drill 0.3)  (1 unrouted)
  Top 0.152: Q7.3 110.05,23.95 109.85,23.75 v109.85,23.44 | J2.2 144.98,30.92 142.79,28.73 v142.46,28.73 | v137.63,23.37 137.45,23.19 137.45,22.62 136.87,22.04 v136.87,21.26
  Top 0.203: IC2.8 108.79,73.27 108.6,73.08 108.6,72.52 | 108.6,72.52 108.6,71.5 108.75,71.35 109.67,71.35 C14.1 109.69,70.59 | R11.2 102.7,74.3 v102.71,74.3 | v108.04,72.52 108.6,72.52
  Top 0.254: v110.48,70.21 110.08,70.21 109.69,70.59 | C35.2 134.13,93.7 v132.63,92.2
  Top 0.305: Q7.3 111.66,23.95 Q7.P2
  Top 0.356: C35.2 134.93,97.97 J30.6
  SUPPLY 0.152: v136.87,21.26 135.81,20.19 115.8,20.19 115.59,19.99 114,19.99 113.66,19.65 113.66,19.59 112.11,18.03 v111.68,18.03
  SUPPLY 0.254: v109.85,23.44 108.3,24.99 108.3,41.88 122.5,56.08 122.5,66.8 118.81,70.48 | 118.81,70.48 110.76,70.48 v110.48,70.21 | 118.81,70.48 132.81,84.48 132.81,92.1 132.71,92.2 v132.63,92.2
  Bottom 0.152: v109.85,23.44 109.85,19.86 v111.68,18.03 111.84,17.86 | v142.46,28.73 140.48,26.75 140.48,26.52 137.63,23.67 v137.63,23.37
  Bottom 0.203: v102.71,74.3 102.71,73.03 103.27,72.47 104.95,72.47 105.28,72.14 107.66,72.14 v108.04,72.52 | 112.56,8.09 112.56,17.14 111.84,17.86
  Bottom 0.254: JP1.2 146.28,30.99 J2.2
+5V  (via drill 0.3, 0.8)  (2 unrouted)
  Top 0.356: 51.57,63.9 v51.58,63.91
  Top 0.508: D28.+ 70.15,63.12 v70.15,65.15 70.15,67.41 C158.1
  Top 0.61: C158.1 70.22,71.78 C156.1 70.15,71.91 70.15,73.41 70.6,73.86 72.79,73.86 73.35,74.42 76.67,74.42 77.74,73.36 TP65.TP
  Top 1.016: C156.1 70.07,71.93 68.01,71.93 66.86,70.78 L14.2 | 55.96,58.88 v59.44,62.36 | 51.57,63.9 C160.2 R194.1
  Top 1.2: C149.1 51.62,56.84 52.33,56.13 C150.1 | 57.66,54.55 U2.8 | 57.66,54.55 59.46,54.55 | 57.59,54.61 57.66,54.55
  SUPPLY 0.356: v51.58,63.91 68.9,63.91 v70.15,65.15
  Bottom 1.016: v59.44,62.36 57.28,62.36 56.52,61.6 54.61,61.6 52.3,63.91 v51.58,63.91
+SMB  (via drill 0.3, 0.8)  (11 unrouted)
  Top 0.152: R20.6 74.02,20.68 73.79,20.45 73.79,19.56 73.53,19.3 72.26,19.3 71.75,19.81 71.22,19.81 Q5.4
  Top 0.203: C154.1 53.24,69.78 52.85,69.39 IC21.8 51.07,69.39 50.77,69.09 50.77,68.33 51,68.09 IC21.6 53.03,68.09 53.24,67.88 C155.1
  Top 0.305: Q5.4 70.04,19.88 69.72,20.19 69.72,23.24 69.47,23.5 v69.22,23.5 | v130.89,86.87 130.84,86.91 C28.1
  Top 0.356: C28.1 127.94,86.91 127.55,87.3 IC9.5 | 52.88,40.94 52.69,41.13
  Top 0.457: C154.1 53.64,70.46 53.48,70.61 52.88,70.61 52.62,70.86 C153.1
  Top 0.508: C155.1 R189.2 | Q2.4 90.76,74.94 90.39,75.31 C11.1 | 55.94,31.19 Q18.3
  Top 0.61: C153.1 C152.1
  Top 0.8: R154.2 66.88,43.34 Q14.4 | R40.2 R41.2 61.57,44.88 61.57,44.82 60.82,44.07 v60.33,44.07
  Top 1: R170.1 53.98,31.21 Q18.3 58.39,31.21 59.18,32 59.18,34.29 60.59,35.69 65.65,35.69 66.22,35.13
  Top 1.2: v69.09,44.07 68.36,43.34 66.88,43.34
  Top 1.27: C135.1 51.14,42.68 52.69,41.13 | 52.88,40.94 R156.2 54.53,40.89 55.75,40.89 56.12,40.53 Q15.3
  SUPPLY 0.305: J1.10 166.59,16.71 165.58,16.71 164.03,18.26 164.03,49.28 160.07,53.24 | 132.21,74.4 v131.62,74.98
  SUPPLY 0.356: 160.07,53.24 159.84,53.47 159.84,70.41 156.97,73.28 133.32,73.28 132.21,74.4
  SUPPLY 1.2: v60.33,44.07 v69.09,44.07
  Bottom 0.305: v131.62,74.98 131.62,86.13 v130.89,86.87
+SMB_PRE  (1 unrouted)
  Top 2: J15.9 J15.9A 14.67,27.88 17.35,30.56 F3.1
/3.3V1_ON  (via drill 0.3)
  Top 0.152: IC3.95 131.21,25.18 v130.45,24.41 | v118.79,22.71 113.63,22.73 113.5,22.61 112.84,22.61 112.74,22.71 109.75,22.71 109.26,23.19 109.26,24.33 109.53,24.6 Q7.2
  Bottom 0.152: v118.79,22.71 118.88,22.71 119.67,23.49 121,23.49 121,23.5 121.38,23.5 121.63,23.75 128.68,23.75 129.04,24.1 130.14,24.1 v130.45,24.41
/3.3V2_ON  (via drill 0.3)
  Top 0.152: IC3.94 130.81,25.28 130.52,24.99 130.21,24.99 129.86,24.64 129.86,24.13 129.88,24.1 129.9,24.1 130.3,23.7 130.3,23.05 129.87,22.61 129.87,21.69 129,20.83 v126.84,20.83 | v117.44,23.37 117.44,25.53 116.55,26.42 115.92,26.42 115.03,25.53 113.89,25.53 113.63,25.27 113.63,24.77 113.47,24.6 Q7.5
  Bottom 0.152: v117.44,23.37 117.44,22.86 118.2,22.1 125.57,22.1 v126.84,20.83
/CL_CS1  (via drill 0.3)
  Top 0.152: IC3.1 136.09,29.1 136.49,28.7 136.49,28.32 138.52,26.29 v138.52,18.41
  Bottom 0.152: v138.52,18.41 139.67,17.27 v139.67,16
/CL_CS2  (via drill 0.3)
  Top 0.152: IC3.17 133.13,35.5 v133.06,35.43 | v136.87,22.86 136.57,22.55 136.57,22.49 136.29,22.21 136.29,18.99 134.59,17.29 v134.59,16.76 | v134.59,14.22 140.41,14.22 142.75,16.56 144.65,16.56 v144.93,16.84
  Bottom 0.152: v133.06,35.43 133.06,34.1 133.64,33.52 133.64,33.03 133.37,32.76 133.37,30.58 133.5,30.45 133.5,25.27 135.07,23.7 136.04,23.7 v136.87,22.86 | v134.59,16.76 v134.59,14.22 | v144.93,16.84 145.26,17.17 154.94,17.17 155.93,16.18 155.93,9.17 159.03,6.07 163.68,6.07 165.35,4.39 170.16,4.39 170.71,4.95 170.71,12.6 169.98,13.34 167.86,13.34 J1.7
/CTS
  Top 0.152: IC18.11 145.73,94.11 145.34,94.5 J41.2
/FMEM1_CS  (via drill 0.3)
  Top 0.152: R24.2 133.46,59.6 133.24,59.38 133.24,58.12 133.45,57.91 IC8.1
  Top 0.203: IC3.28 132.41,39.61 132.83,39.19 133.52,39.19 133.72,39.4 133.72,40.63 v133.99,40.89 | IC8.1 136.98,57.91 137.81,57.07 137.81,53.26 138.8,52.27 138.8,47.36 v137.16,45.72
  SUPPLY 0.203: v133.99,40.89 133.99,42.93 136.78,45.72 v137.16,45.72
/MCLR  (via drill 0.3)
  Top 0.152: J11.1 127.23,52.01 R14.1 | v131.79,33.88 131.81,33.9 IC3.13 | IC4.4 83.19,14.99 82.93,14.73 v82.3,14.73
  Bottom 0.152: J11.1 127.23,46.47 125.01,44.25 123.44,44.25 122.98,43.79 122.98,42.9 124.84,41.04 124.84,36.55 | v131.79,33.88 127.5,33.88 124.84,36.55 | v82.3,14.73 83.38,14.73 84.27,15.62 89.08,15.62 89.15,15.54 90.3,15.54 91.06,16.31 101.02,16.31 102.75,18.03 105.82,18.03 106.35,18.57 106.35,22.83 108.28,24.76 108.28,26.41 109.04,27.18 109.73,27.18 | 109.73,27.18 | 109.73,27.18 109.99,27.18 111.43,25.73 113.54,25.73 114.17,26.37 114.17,26.89 114.52,27.23 114.71,27.23 115.51,28.03 115.51,33.83 116.22,34.54 119.89,34.54 121.89,36.55 124.84,36.55
/MCLR2  (via drill 0.3)